# Altium PCB Grove-EMG Sensor v1.1.PcbDoc
Units mil, origin at the board's own origin, x right, y up, seen from the top; angles counter-clockwise.
Board outline 2437.42 x 1044.49 mil, 2 copper layers (Top, Bottom); 56 components, 20 nets, 216 pads, 43 vias.
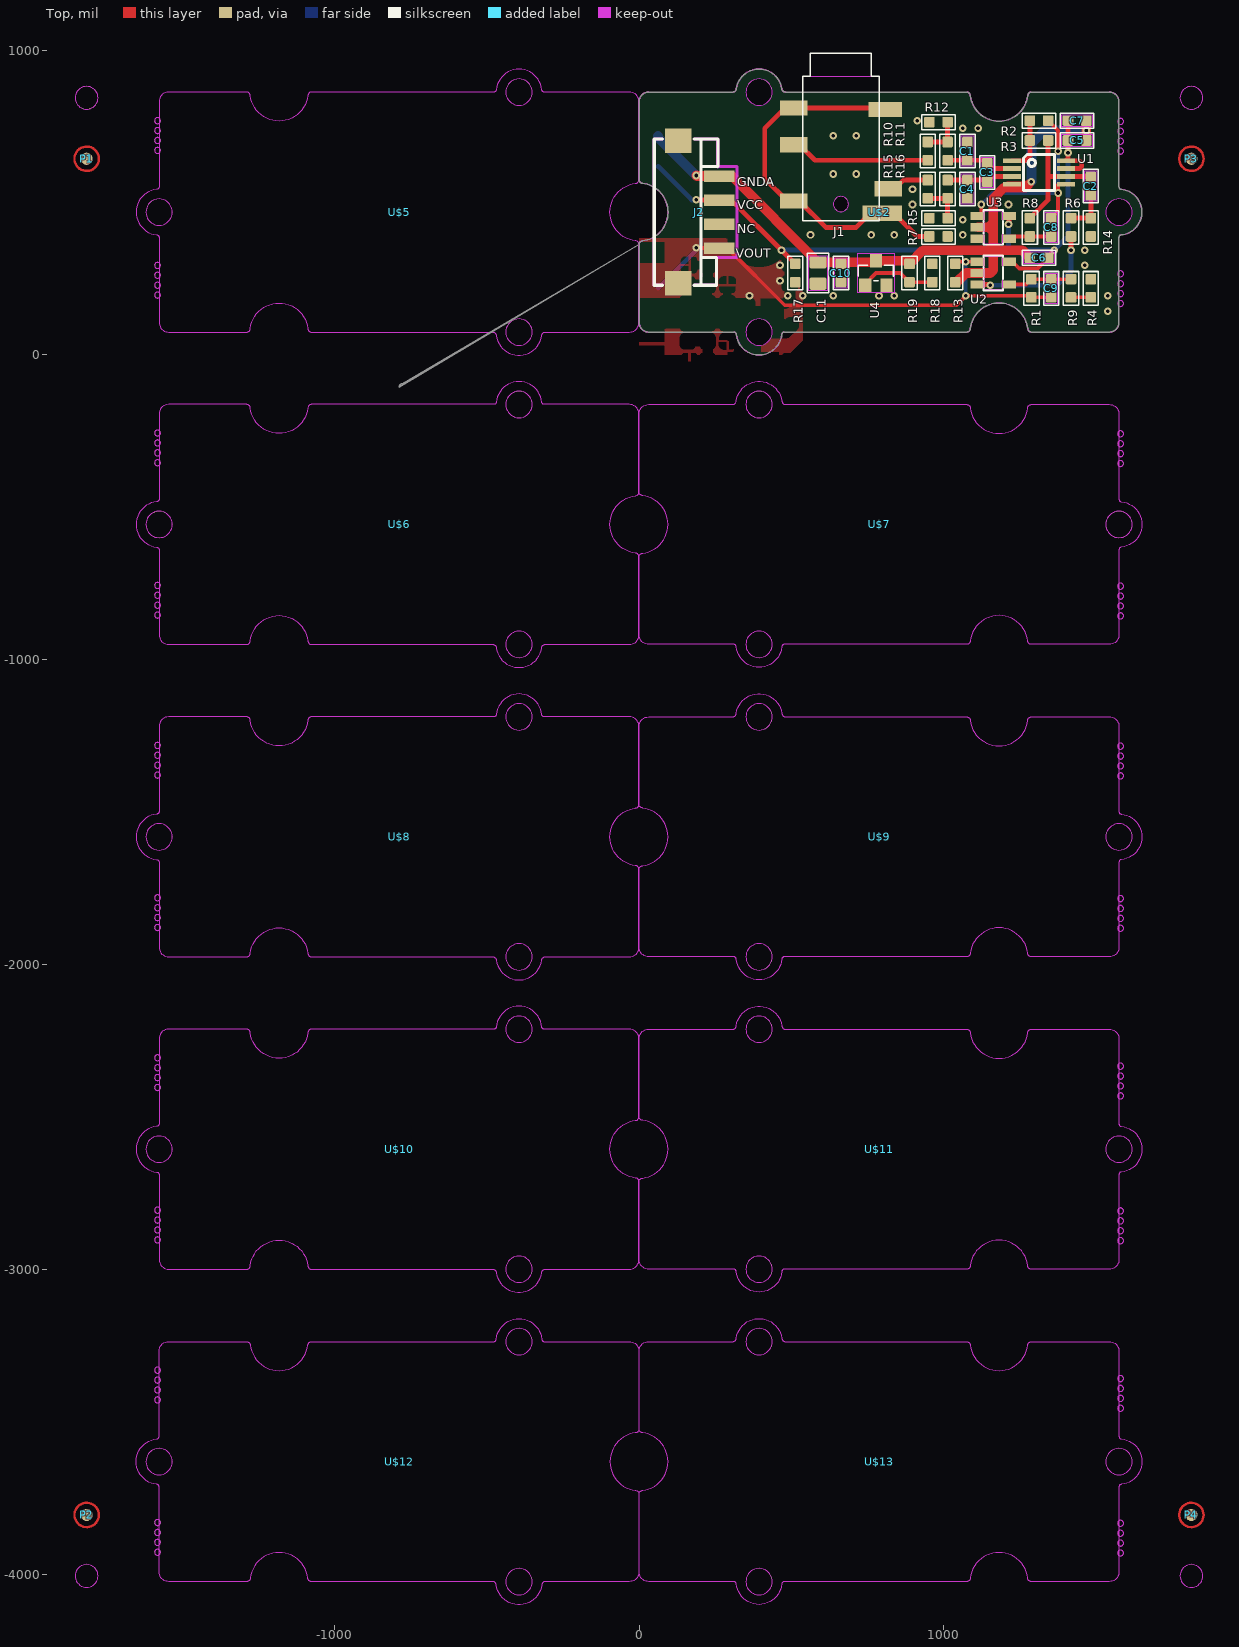
[diagram p0: Top view]
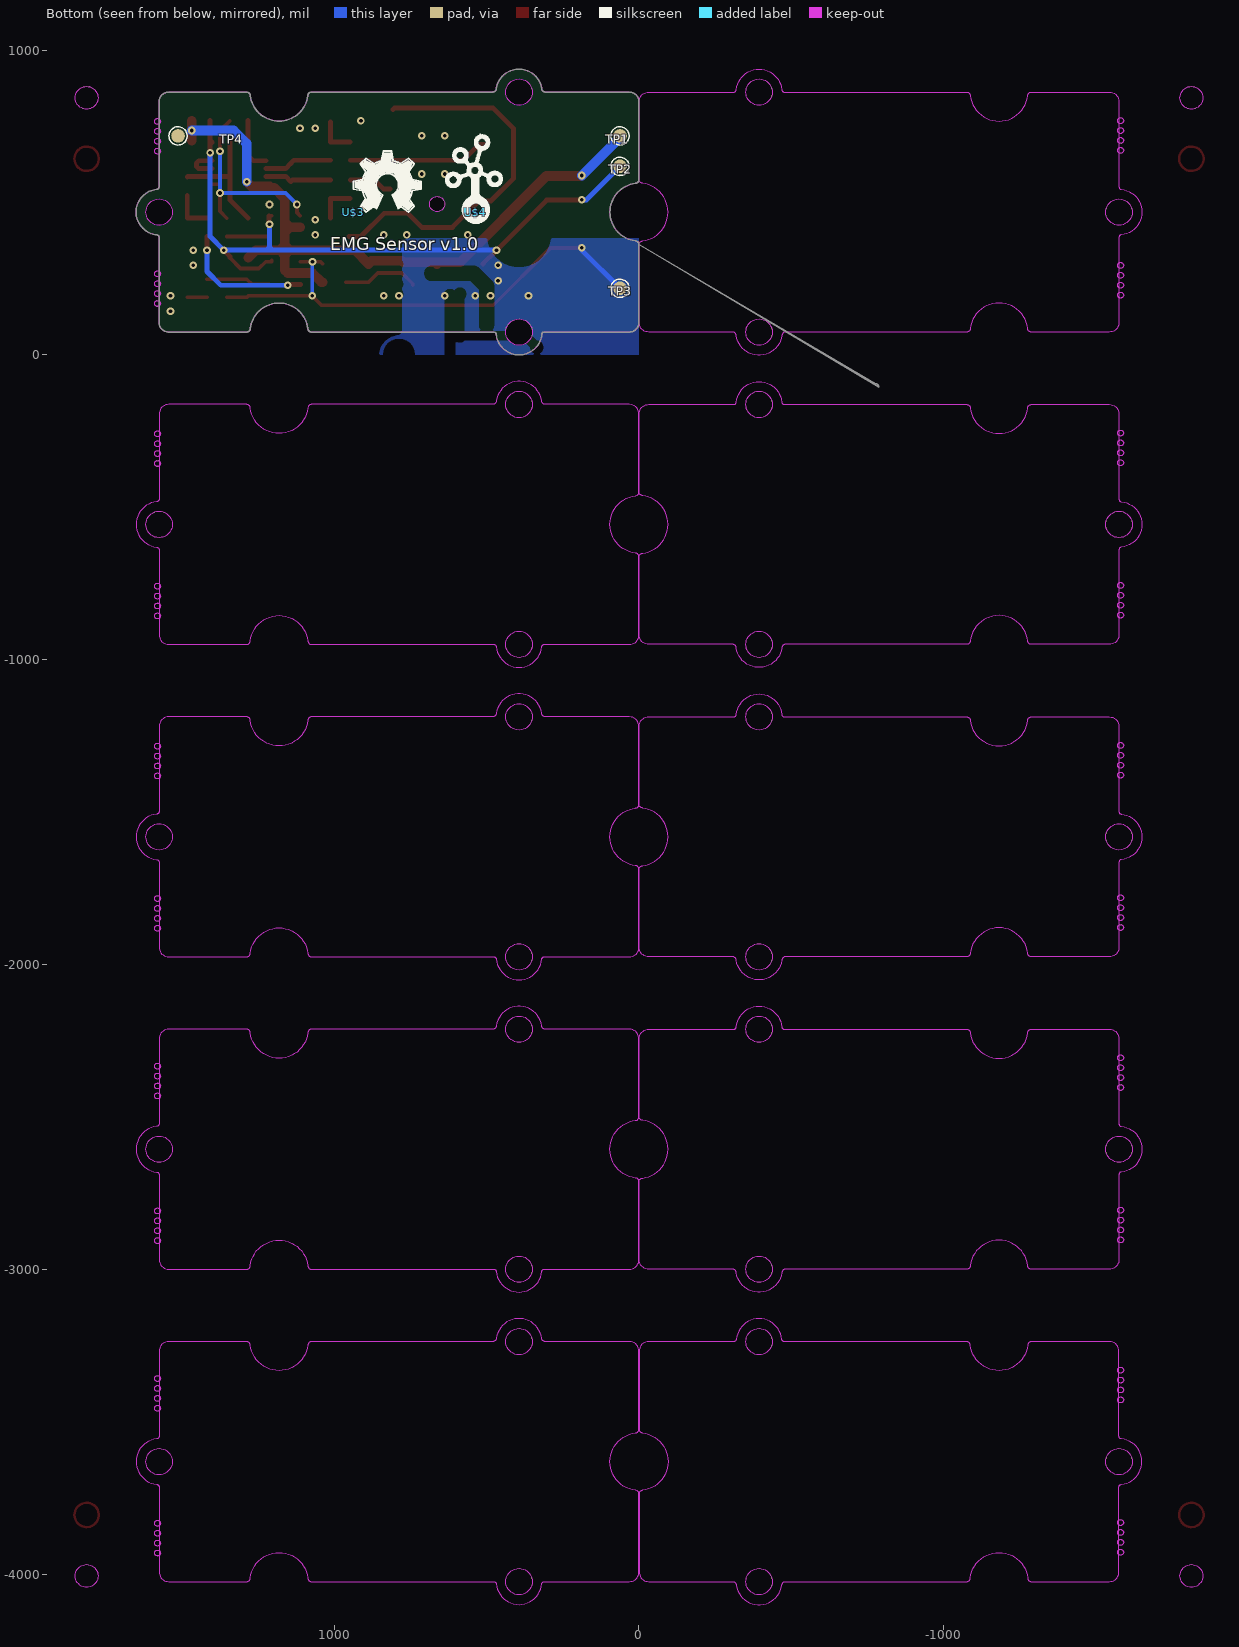
[diagram p1: Bottom view, seen from below]

## Layer stack, top to bottom
Top Solder: solder mask 0.4, Solder Resist, Dk 3.5
Top: signal copper 1.378
Dielectric 1: dielectric 12.6, FR-4, Dk 4.8
Bottom: signal copper 1.378
Bottom Solder: solder mask 0.4, Solder Resist, Dk 3.5

## Board outline
0,362.61 cw(c11.81,362.61) 11.81,374.42 ccw(c0,468.91) 11.81,563.4 cw(c11.81,575.21) 0,575.21 0,831.11 cw(c31.5,831.11) 31.49,862.61 307.08,862.61 ccw(c307.08,874.42) 318.9,874.42 cw(c393.7,862.61) 468.5,874.42 ccw(c480.31,874.42) 480.31,862.61 1074.8,862.61 cw(c1074.8,850.8) 1086.61,850.8 ccw(c1181.1,862.61) 1275.59,850.8 cw(c1287.4,850.8) 1287.4,862.61 1543.31,862.61 cw(c1543.31,831.11) 1574.8,831.11 1574.8,551.59 ccw(c1582.68,551.59) 1582.68,543.71 cw(c1574.81,468.91) 1582.68,394.11 ccw(c1582.68,386.23) 1574.8,386.23 1574.8,106.71 cw(c1543.31,106.7) 1543.31,75.21 1287.4,75.21 cw(c1287.4,87.02) 1275.59,87.02 ccw(c1181.1,75.21) 1086.61,87.02 cw(c1074.8,87.02) 1074.8,75.21 476.38,75.21 ccw(c476.38,67.33) 468.5,67.34 cw(c393.7,75.21) 318.9,67.34 ccw(c311.02,67.33) 311.02,75.21 31.49,75.21 cw(c31.5,106.7) 0,106.71 0,362.61 ccw(c-775.59,-106.3)
cut-out: -0.2,-2243.89 ccw(c-31.7,-2243.89) -31.69,-2212.39 -311.22,-2212.39 cw(c-311.23,-2204.52) -319.1,-2204.52 ccw(c-393.9,-2212.39) -468.7,-2204.52 cw(c-476.57,-2204.52) -476.58,-2212.39 -1075,-2212.39 ccw(c-1075,-2224.2) -1086.81,-2224.2 cw(c-1181.3,-2212.39) -1275.79,-2224.2 ccw(c-1287.6,-2224.2) -1287.6,-2212.39 -1543.51,-2212.39 ccw(c-1543.51,-2243.89) -1575,-2243.89 -1575,-2523.41 cw(c-1582.88,-2523.41) -1582.88,-2531.29 ccw(c-1575.01,-2606.09) -1582.88,-2680.89 cw(c-1582.88,-2688.77) -1575,-2688.77 -1575,-2968.29 ccw(c-1543.51,-2968.3) -1543.51,-2999.79 -1287.6,-2999.79 ccw(c-1287.6,-2987.98) -1275.79,-2987.98 cw(c-1181.3,-2999.79) -1086.81,-2987.98 ccw(c-1075,-2987.98) -1075,-2999.79 -480.51,-2999.79 cw(c-480.51,-3011.6) -468.7,-3011.6 ccw(c-393.9,-2999.79) -319.1,-3011.6 cw(c-307.29,-3011.61) -307.28,-2999.79 -31.69,-2999.79 ccw(c-31.7,-2968.3) -0.2,-2968.29 -0.2,-2712.39 ccw(c-12.01,-2712.39) -12.01,-2700.58 cw(c-0.2,-2606.09) -12.01,-2511.6 ccw(c-12.01,-2499.79) -0.2,-2499.79
cut-out: 0,-1687.39 cw(c11.81,-1687.39) 11.81,-1675.58 ccw(c0,-1581.09) 11.81,-1486.6 cw(c11.81,-1474.79) 0,-1474.79 0,-1218.89 cw(c31.5,-1218.89) 31.49,-1187.39 307.08,-1187.39 ccw(c307.08,-1175.58) 318.9,-1175.58 cw(c393.7,-1187.39) 468.5,-1175.58 ccw(c480.31,-1175.58) 480.31,-1187.39 1074.8,-1187.39 cw(c1074.8,-1199.2) 1086.61,-1199.2 ccw(c1181.1,-1187.39) 1275.59,-1199.2 cw(c1287.4,-1199.2) 1287.4,-1187.39 1543.31,-1187.39 cw(c1543.31,-1218.89) 1574.8,-1218.89 1574.8,-1498.41 ccw(c1582.68,-1498.41) 1582.68,-1506.29 cw(c1574.81,-1581.09) 1582.68,-1655.89 ccw(c1582.68,-1663.77) 1574.8,-1663.77 1574.8,-1943.29 cw(c1543.31,-1943.3) 1543.31,-1974.79 1287.4,-1974.79 cw(c1287.4,-1962.98) 1275.59,-1962.98 ccw(c1181.1,-1974.79) 1086.61,-1962.98 cw(c1074.8,-1962.98) 1074.8,-1974.79 476.38,-1974.79 ccw(c476.38,-1982.67) 468.5,-1982.66 cw(c393.7,-1974.79) 318.9,-1982.66 ccw(c311.02,-1982.67) 311.02,-1974.79 31.49,-1974.79 cw(c31.5,-1943.3) 0,-1943.29
cut-out: 0,-2712.39 cw(c11.81,-2712.39) 11.81,-2700.58 ccw(c0,-2606.09) 11.81,-2511.6 cw(c11.81,-2499.79) 0,-2499.79 0,-2243.89 cw(c31.5,-2243.89) 31.49,-2212.39 307.08,-2212.39 ccw(c307.08,-2200.58) 318.9,-2200.58 cw(c393.7,-2212.39) 468.5,-2200.58 ccw(c480.31,-2200.58) 480.31,-2212.39 1074.8,-2212.39 cw(c1074.8,-2224.2) 1086.61,-2224.2 ccw(c1181.1,-2212.39) 1275.59,-2224.2 cw(c1287.4,-2224.2) 1287.4,-2212.39 1543.31,-2212.39 cw(c1543.31,-2243.89) 1574.8,-2243.89 1574.8,-2523.41 ccw(c1582.68,-2523.41) 1582.68,-2531.29 cw(c1574.81,-2606.09) 1582.68,-2680.89 ccw(c1582.68,-2688.77) 1574.8,-2688.77 1574.8,-2968.29 cw(c1543.31,-2968.3) 1543.31,-2999.79 1287.4,-2999.79 cw(c1287.4,-2987.98) 1275.59,-2987.98 ccw(c1181.1,-2999.79) 1086.61,-2987.98 cw(c1074.8,-2987.98) 1074.8,-2999.79 476.38,-2999.79 ccw(c476.38,-3007.67) 468.5,-3007.66 cw(c393.7,-2999.79) 318.9,-3007.66 ccw(c311.02,-3007.67) 311.02,-2999.79 31.49,-2999.79 cw(c31.5,-2968.3) 0,-2968.29
cut-out: 0,-3737.39 cw(c11.81,-3737.39) 11.81,-3725.58 ccw(c0,-3631.09) 11.81,-3536.6 cw(c11.81,-3524.79) 0,-3524.79 0,-3268.89 cw(c31.5,-3268.89) 31.49,-3237.39 307.08,-3237.39 ccw(c307.08,-3225.58) 318.9,-3225.58 cw(c393.7,-3237.39) 468.5,-3225.58 ccw(c480.31,-3225.58) 480.31,-3237.39 1074.8,-3237.39 cw(c1074.8,-3249.2) 1086.61,-3249.2 ccw(c1181.1,-3237.39) 1275.59,-3249.2 cw(c1287.4,-3249.2) 1287.4,-3237.39 1543.31,-3237.39 cw(c1543.31,-3268.89) 1574.8,-3268.89 1574.8,-3548.41 ccw(c1582.68,-3548.41) 1582.68,-3556.29 cw(c1574.81,-3631.09) 1582.68,-3705.89 ccw(c1582.68,-3713.77) 1574.8,-3713.77 1574.8,-3993.29 cw(c1543.31,-3993.3) 1543.31,-4024.79 1287.4,-4024.79 cw(c1287.4,-4012.98) 1275.59,-4012.98 ccw(c1181.1,-4024.79) 1086.61,-4012.98 cw(c1074.8,-4012.98) 1074.8,-4024.79 476.38,-4024.79 ccw(c476.38,-4032.67) 468.5,-4032.66 cw(c393.7,-4024.79) 318.9,-4032.66 ccw(c311.02,-4032.67) 311.02,-4024.79 31.49,-4024.79 cw(c31.5,-3993.3) 0,-3993.29
cut-out: -0.2,-3524.79 cw(c-12.01,-3524.79) -12.01,-3536.6 ccw(c-0.2,-3631.09) -12.01,-3725.58 cw(c-12.01,-3737.39) -0.2,-3737.39 -0.2,-3993.29 cw(c-31.7,-3993.3) -31.69,-4024.79 -307.28,-4024.79 ccw(c-307.29,-4036.61) -319.1,-4036.6 cw(c-393.9,-4024.79) -468.7,-4036.6 ccw(c-480.51,-4036.6) -480.51,-4024.79 -1075,-4024.79 cw(c-1075,-4012.98) -1086.81,-4012.98 ccw(c-1181.3,-4024.79) -1275.79,-4012.98 cw(c-1287.6,-4012.98) -1287.6,-4024.79 -1543.51,-4024.79 cw(c-1543.51,-3993.3) -1575,-3993.29 -1575,-3713.77 ccw(c-1582.88,-3713.77) -1582.88,-3705.89 cw(c-1575.01,-3631.09) -1582.88,-3556.29 ccw(c-1582.88,-3548.41) -1575,-3548.41 -1575,-3268.89 cw(c-1543.51,-3268.89) -1543.51,-3237.39 -1287.6,-3237.39 cw(c-1287.6,-3249.2) -1275.79,-3249.2 ccw(c-1181.3,-3237.39) -1086.81,-3249.2 cw(c-1075,-3249.2) -1075,-3237.39 -476.58,-3237.39 ccw(c-476.57,-3229.52) -468.7,-3229.52 cw(c-393.9,-3237.39) -319.1,-3229.52 ccw(c-311.23,-3229.52) -311.22,-3237.39 -31.69,-3237.39 cw(c-31.7,-3268.89) -0.2,-3268.89
cut-out: -0.2,-1218.89 ccw(c-31.7,-1218.89) -31.69,-1187.39 -311.22,-1187.39 cw(c-311.23,-1179.52) -319.1,-1179.52 ccw(c-393.9,-1187.39) -468.7,-1179.52 cw(c-476.57,-1179.52) -476.58,-1187.39 -1075,-1187.39 ccw(c-1075,-1199.2) -1086.81,-1199.2 cw(c-1181.3,-1187.39) -1275.79,-1199.2 ccw(c-1287.6,-1199.2) -1287.6,-1187.39 -1543.51,-1187.39 ccw(c-1543.51,-1218.89) -1575,-1218.89 -1575,-1498.41 cw(c-1582.88,-1498.41) -1582.88,-1506.29 ccw(c-1575.01,-1581.09) -1582.88,-1655.89 cw(c-1582.88,-1663.77) -1575,-1663.77 -1575,-1943.29 ccw(c-1543.51,-1943.3) -1543.51,-1974.79 -1287.6,-1974.79 ccw(c-1287.6,-1962.98) -1275.79,-1962.98 cw(c-1181.3,-1974.79) -1086.81,-1962.98 ccw(c-1075,-1962.98) -1075,-1974.79 -480.51,-1974.79 cw(c-480.51,-1986.6) -468.7,-1986.6 ccw(c-393.9,-1974.79) -319.1,-1986.6 cw(c-307.29,-1986.61) -307.28,-1974.79 -31.69,-1974.79 ccw(c-31.7,-1943.3) -0.2,-1943.29 -0.2,-1687.39 ccw(c-12.01,-1687.39) -12.01,-1675.58 cw(c-0.2,-1581.09) -12.01,-1486.6 ccw(c-12.01,-1474.79) -0.2,-1474.79
cut-out: -0.2,831.11 ccw(c-31.7,831.11) -31.69,862.61 -311.22,862.61 cw(c-311.23,870.48) -319.1,870.48 ccw(c-393.9,862.61) -468.7,870.48 cw(c-476.57,870.48) -476.58,862.61 -1075,862.61 ccw(c-1075,850.8) -1086.81,850.8 cw(c-1181.3,862.61) -1275.79,850.8 ccw(c-1287.6,850.8) -1287.6,862.61 -1543.51,862.61 ccw(c-1543.51,831.11) -1575,831.11 -1575,551.59 cw(c-1582.88,551.59) -1582.88,543.71 ccw(c-1575.01,468.91) -1582.88,394.11 cw(c-1582.88,386.23) -1575,386.23 -1575,106.71 ccw(c-1543.51,106.7) -1543.51,75.21 -1287.6,75.21 ccw(c-1287.6,87.02) -1275.79,87.02 cw(c-1181.3,75.21) -1086.81,87.02 ccw(c-1075,87.02) -1075,75.21 -480.51,75.21 cw(c-480.51,63.4) -468.7,63.4 ccw(c-393.9,75.21) -319.1,63.4 cw(c-307.29,63.39) -307.28,75.21 -31.69,75.21 ccw(c-31.7,106.7) -0.2,106.71 -0.2,362.61 ccw(c-12.01,362.61) -12.01,374.42 cw(c-0.2,468.91) -12.01,563.4 ccw(c-12.01,575.21) -0.2,575.21
cut-out: 0,-662.39 cw(c11.81,-662.39) 11.81,-650.58 ccw(c0,-556.09) 11.81,-461.6 cw(c11.81,-449.79) 0,-449.79 0,-193.89 cw(c31.5,-193.89) 31.49,-162.39 307.08,-162.39 ccw(c307.08,-150.58) 318.9,-150.58 cw(c393.7,-162.39) 468.5,-150.58 ccw(c480.31,-150.58) 480.31,-162.39 1074.8,-162.39 cw(c1074.8,-174.2) 1086.61,-174.2 ccw(c1181.1,-162.39) 1275.59,-174.2 cw(c1287.4,-174.2) 1287.4,-162.39 1543.31,-162.39 cw(c1543.31,-193.89) 1574.8,-193.89 1574.8,-473.41 ccw(c1582.68,-473.41) 1582.68,-481.29 cw(c1574.81,-556.09) 1582.68,-630.89 ccw(c1582.68,-638.77) 1574.8,-638.77 1574.8,-918.29 cw(c1543.31,-918.3) 1543.31,-949.79 1287.4,-949.79 cw(c1287.4,-937.98) 1275.59,-937.98 ccw(c1181.1,-949.79) 1086.61,-937.98 cw(c1074.8,-937.98) 1074.8,-949.79 476.38,-949.79 ccw(c476.38,-957.67) 468.5,-957.66 cw(c393.7,-949.79) 318.9,-957.66 ccw(c311.02,-957.67) 311.02,-949.79 31.49,-949.79 cw(c31.5,-918.3) 0,-918.29
cut-out: -0.2,-193.89 ccw(c-31.7,-193.89) -31.69,-162.39 -311.22,-162.39 cw(c-311.23,-154.52) -319.1,-154.52 ccw(c-393.9,-162.39) -468.7,-154.52 cw(c-476.57,-154.52) -476.58,-162.39 -1075,-162.39 ccw(c-1075,-174.2) -1086.81,-174.2 cw(c-1181.3,-162.39) -1275.79,-174.2 ccw(c-1287.6,-174.2) -1287.6,-162.39 -1543.51,-162.39 ccw(c-1543.51,-193.89) -1575,-193.89 -1575,-473.41 cw(c-1582.88,-473.41) -1582.88,-481.29 ccw(c-1575.01,-556.09) -1582.88,-630.89 cw(c-1582.88,-638.77) -1575,-638.77 -1575,-918.29 ccw(c-1543.51,-918.3) -1543.51,-949.79 -1287.6,-949.79 ccw(c-1287.6,-937.98) -1275.79,-937.98 cw(c-1181.3,-949.79) -1086.81,-937.98 ccw(c-1075,-937.98) -1075,-949.79 -480.51,-949.79 cw(c-480.51,-961.6) -468.7,-961.6 ccw(c-393.9,-949.79) -319.1,-961.6 cw(c-307.29,-961.61) -307.28,-949.79 -31.69,-949.79 ccw(c-31.7,-918.3) -0.2,-918.29 -0.2,-662.39 ccw(c-12.01,-662.39) -12.01,-650.58 cw(c-0.2,-556.09) -12.01,-461.6 ccw(c-12.01,-449.79) -0.2,-449.79
cut-out: 393.7,-205.7 ccw(c393.7,-162.39) 437,-162.39 ccw(c393.7,-162.39) 393.7,-119.09 ccw(c393.7,-162.39) 350.39,-162.39 ccw(c393.7,-162.39)
cut-out: 393.7,-993.1 ccw(c393.7,-949.79) 437,-949.79 ccw(c393.7,-949.79) 393.7,-906.49 ccw(c393.7,-949.79) 350.39,-949.79 ccw(c393.7,-949.79)
cut-out: -1575,-599.4 ccw(c-1575,-556.09) -1531.69,-556.09 ccw(c-1575,-556.09) -1575,-512.79 ccw(c-1575,-556.09) -1618.31,-556.09 ccw(c-1575,-556.09)
cut-out: 1574.8,-599.4 ccw(c1574.8,-556.09) 1618.11,-556.09 ccw(c1574.8,-556.09) 1574.8,-512.79 ccw(c1574.8,-556.09) 1531.49,-556.09 ccw(c1574.8,-556.09)
cut-out: -1575,-1624.4 ccw(c-1575,-1581.09) -1531.69,-1581.09 ccw(c-1575,-1581.09) -1575,-1537.79 ccw(c-1575,-1581.09) -1618.31,-1581.09 ccw(c-1575,-1581.09)
cut-out: -393.9,-2018.1 ccw(c-393.9,-1974.79) -350.6,-1974.79 ccw(c-393.9,-1974.79) -393.9,-1931.49 ccw(c-393.9,-1974.79) -437.2,-1974.79 ccw(c-393.9,-1974.79)
cut-out: -393.9,-1230.7 ccw(c-393.9,-1187.39) -350.6,-1187.39 ccw(c-393.9,-1187.39) -393.9,-1144.09 ccw(c-393.9,-1187.39) -437.2,-1187.39 ccw(c-393.9,-1187.39)
cut-out: -393.9,-993.1 ccw(c-393.9,-949.79) -350.6,-949.79 ccw(c-393.9,-949.79) -393.9,-906.49 ccw(c-393.9,-949.79) -437.2,-949.79 ccw(c-393.9,-949.79)
cut-out: 1574.8,425.6 ccw(c1574.8,468.91) 1618.11,468.91 ccw(c1574.8,468.91) 1574.8,512.21 ccw(c1574.8,468.91) 1531.49,468.91 ccw(c1574.8,468.91)
cut-out: 393.7,819.3 ccw(c393.7,862.61) 437,862.61 ccw(c393.7,862.61) 393.7,905.91 ccw(c393.7,862.61) 350.39,862.61 ccw(c393.7,862.61)
cut-out: 393.7,31.9 ccw(c393.7,75.21) 437,75.21 ccw(c393.7,75.21) 393.7,118.51 ccw(c393.7,75.21) 350.39,75.21 ccw(c393.7,75.21)
cut-out: -393.9,819.3 ccw(c-393.9,862.61) -350.6,862.61 ccw(c-393.9,862.61) -393.9,905.91 ccw(c-393.9,862.61) -437.2,862.61 ccw(c-393.9,862.61)
cut-out: -393.9,-205.7 ccw(c-393.9,-162.39) -350.6,-162.39 ccw(c-393.9,-162.39) -393.9,-119.09 ccw(c-393.9,-162.39) -437.2,-162.39 ccw(c-393.9,-162.39)
cut-out: -1575,425.6 ccw(c-1575,468.91) -1531.69,468.91 ccw(c-1575,468.91) -1575,512.21 ccw(c-1575,468.91) -1618.31,468.91 ccw(c-1575,468.91)
cut-out: -393.9,31.9 ccw(c-393.9,75.21) -350.6,75.21 ccw(c-393.9,75.21) -393.9,118.51 ccw(c-393.9,75.21) -437.2,75.21 ccw(c-393.9,75.21)
cut-out: -393.9,-4068.1 ccw(c-393.9,-4024.79) -350.6,-4024.79 ccw(c-393.9,-4024.79) -393.9,-3981.49 ccw(c-393.9,-4024.79) -437.2,-4024.79 ccw(c-393.9,-4024.79)
cut-out: -393.9,-3280.7 ccw(c-393.9,-3237.39) -350.6,-3237.39 ccw(c-393.9,-3237.39) -393.9,-3194.09 ccw(c-393.9,-3237.39) -437.2,-3237.39 ccw(c-393.9,-3237.39)
cut-out: 1574.8,-2649.4 ccw(c1574.8,-2606.09) 1618.11,-2606.09 ccw(c1574.8,-2606.09) 1574.8,-2562.79 ccw(c1574.8,-2606.09) 1531.49,-2606.09 ccw(c1574.8,-2606.09)
cut-out: -1575,-3674.4 ccw(c-1575,-3631.09) -1531.69,-3631.09 ccw(c-1575,-3631.09) -1575,-3587.79 ccw(c-1575,-3631.09) -1618.31,-3631.09 ccw(c-1575,-3631.09)
cut-out: 1574.8,-3674.4 ccw(c1574.8,-3631.09) 1618.11,-3631.09 ccw(c1574.8,-3631.09) 1574.8,-3587.79 ccw(c1574.8,-3631.09) 1531.49,-3631.09 ccw(c1574.8,-3631.09)
cut-out: 393.7,-3280.7 ccw(c393.7,-3237.39) 437,-3237.39 ccw(c393.7,-3237.39) 393.7,-3194.09 ccw(c393.7,-3237.39) 350.39,-3237.39 ccw(c393.7,-3237.39)
cut-out: 393.7,-4068.1 ccw(c393.7,-4024.79) 437,-4024.79 ccw(c393.7,-4024.79) 393.7,-3981.49 ccw(c393.7,-4024.79) 350.39,-4024.79 ccw(c393.7,-4024.79)
cut-out: 393.7,-2255.7 ccw(c393.7,-2212.39) 437,-2212.39 ccw(c393.7,-2212.39) 393.7,-2169.09 ccw(c393.7,-2212.39) 350.39,-2212.39 ccw(c393.7,-2212.39)
cut-out: 1574.8,-1624.4 ccw(c1574.8,-1581.09) 1618.11,-1581.09 ccw(c1574.8,-1581.09) 1574.8,-1537.79 ccw(c1574.8,-1581.09) 1531.49,-1581.09 ccw(c1574.8,-1581.09)
cut-out: 393.7,-1230.7 ccw(c393.7,-1187.39) 437,-1187.39 ccw(c393.7,-1187.39) 393.7,-1144.09 ccw(c393.7,-1187.39) 350.39,-1187.39 ccw(c393.7,-1187.39)
cut-out: 393.7,-2018.1 ccw(c393.7,-1974.79) 437,-1974.79 ccw(c393.7,-1974.79) 393.7,-1931.49 ccw(c393.7,-1974.79) 350.39,-1974.79 ccw(c393.7,-1974.79)
cut-out: -393.9,-2255.7 ccw(c-393.9,-2212.39) -350.6,-2212.39 ccw(c-393.9,-2212.39) -393.9,-2169.09 ccw(c-393.9,-2212.39) -437.2,-2212.39 ccw(c-393.9,-2212.39)
cut-out: 393.7,-3043.1 ccw(c393.7,-2999.79) 437,-2999.79 ccw(c393.7,-2999.79) 393.7,-2956.49 ccw(c393.7,-2999.79) 350.39,-2999.79 ccw(c393.7,-2999.79)
cut-out: -1575,-2649.4 ccw(c-1575,-2606.09) -1531.69,-2606.09 ccw(c-1575,-2606.09) -1575,-2562.79 ccw(c-1575,-2606.09) -1618.31,-2606.09 ccw(c-1575,-2606.09)
cut-out: -393.9,-3043.1 ccw(c-393.9,-2999.79) -350.6,-2999.79 ccw(c-393.9,-2999.79) -393.9,-2956.49 ccw(c-393.9,-2999.79) -437.2,-2999.79 ccw(c-393.9,-2999.79)
cut-out: 1812.4,806.41 ccw(c1812.4,843.91) 1849.9,843.91 ccw(c1812.4,843.91) 1812.4,881.41 ccw(c1812.4,843.91) 1774.9,843.91 ccw(c1812.4,843.91)
cut-out: -1812.6,806.41 ccw(c-1812.6,843.91) -1775.1,843.91 ccw(c-1812.6,843.91) -1812.6,881.41 ccw(c-1812.6,843.91) -1850.1,843.91 ccw(c-1812.6,843.91)
cut-out: -1812.6,-4043.59 ccw(c-1812.6,-4006.09) -1775.1,-4006.09 ccw(c-1812.6,-4006.09) -1812.6,-3968.59 ccw(c-1812.6,-4006.09) -1850.1,-4006.09 ccw(c-1812.6,-4006.09)
cut-out: 1812.4,-4043.59 ccw(c1812.4,-4006.09) 1849.9,-4006.09 ccw(c1812.4,-4006.09) 1812.4,-3968.59 ccw(c1812.4,-4006.09) 1774.9,-4006.09 ccw(c1812.4,-4006.09)
cut-out: 662.4,470.17 ccw(c662.4,495.17) 687.4,495.17 ccw(c662.4,495.17) 662.4,520.17 ccw(c662.4,495.17) 637.4,495.17 ccw(c662.4,495.17)
cut-out: -1580.1,-3938.44 ccw(c-1580.1,-3928.59) -1570.26,-3928.59 ccw(c-1580.1,-3928.59) -1580.1,-3918.75 ccw(c-1580.1,-3928.59) -1589.94,-3928.59 ccw(c-1580.1,-3928.59)
cut-out: -1580.1,-3840.94 ccw(c-1580.1,-3831.09) -1570.26,-3831.09 ccw(c-1580.1,-3831.09) -1580.1,-3821.25 ccw(c-1580.1,-3831.09) -1589.94,-3831.09 ccw(c-1580.1,-3831.09)
cut-out: 1579.9,-2883.44 ccw(c1579.9,-2873.59) 1589.74,-2873.59 ccw(c1579.9,-2873.59) 1579.9,-2863.75 ccw(c1579.9,-2873.59) 1570.06,-2873.59 ccw(c1579.9,-2873.59)
cut-out: 1579.9,-2408.44 ccw(c1579.9,-2398.59) 1589.74,-2398.59 ccw(c1579.9,-2398.59) 1579.9,-2388.75 ccw(c1579.9,-2398.59) 1570.06,-2398.59 ccw(c1579.9,-2398.59)
cut-out: 1579.9,-2375.94 ccw(c1579.9,-2366.09) 1589.74,-2366.09 ccw(c1579.9,-2366.09) 1579.9,-2356.25 ccw(c1579.9,-2366.09) 1570.06,-2366.09 ccw(c1579.9,-2366.09)
cut-out: 1579.9,-2343.44 ccw(c1579.9,-2333.59) 1589.74,-2333.59 ccw(c1579.9,-2333.59) 1579.9,-2323.75 ccw(c1579.9,-2333.59) 1570.06,-2333.59 ccw(c1579.9,-2333.59)
cut-out: 1579.9,-2850.94 ccw(c1579.9,-2841.09) 1589.74,-2841.09 ccw(c1579.9,-2841.09) 1579.9,-2831.25 ccw(c1579.9,-2841.09) 1570.06,-2841.09 ccw(c1579.9,-2841.09)
cut-out: 1579.9,-2818.44 ccw(c1579.9,-2808.59) 1589.74,-2808.59 ccw(c1579.9,-2808.59) 1579.9,-2798.75 ccw(c1579.9,-2808.59) 1570.06,-2808.59 ccw(c1579.9,-2808.59)
cut-out: 1579.9,-2915.94 ccw(c1579.9,-2906.09) 1589.74,-2906.09 ccw(c1579.9,-2906.09) 1579.9,-2896.25 ccw(c1579.9,-2906.09) 1570.06,-2906.09 ccw(c1579.9,-2906.09)
cut-out: -1580.1,-3905.94 ccw(c-1580.1,-3896.09) -1570.26,-3896.09 ccw(c-1580.1,-3896.09) -1580.1,-3886.25 ccw(c-1580.1,-3896.09) -1589.94,-3896.09 ccw(c-1580.1,-3896.09)
cut-out: 1579.9,-3940.94 ccw(c1579.9,-3931.09) 1589.74,-3931.09 ccw(c1579.9,-3931.09) 1579.9,-3921.25 ccw(c1579.9,-3931.09) 1570.06,-3931.09 ccw(c1579.9,-3931.09)
cut-out: 1579.9,-3433.44 ccw(c1579.9,-3423.59) 1589.74,-3423.59 ccw(c1579.9,-3423.59) 1579.9,-3413.75 ccw(c1579.9,-3423.59) 1570.06,-3423.59 ccw(c1579.9,-3423.59)
cut-out: 1579.9,-3400.94 ccw(c1579.9,-3391.09) 1589.74,-3391.09 ccw(c1579.9,-3391.09) 1579.9,-3381.25 ccw(c1579.9,-3391.09) 1570.06,-3391.09 ccw(c1579.9,-3391.09)
cut-out: 1579.9,-3908.44 ccw(c1579.9,-3898.59) 1589.74,-3898.59 ccw(c1579.9,-3898.59) 1579.9,-3888.75 ccw(c1579.9,-3898.59) 1570.06,-3898.59 ccw(c1579.9,-3898.59)
cut-out: 1579.9,-3875.94 ccw(c1579.9,-3866.09) 1589.74,-3866.09 ccw(c1579.9,-3866.09) 1579.9,-3856.25 ccw(c1579.9,-3866.09) 1570.06,-3866.09 ccw(c1579.9,-3866.09)
cut-out: 1579.9,-3843.44 ccw(c1579.9,-3833.59) 1589.74,-3833.59 ccw(c1579.9,-3833.59) 1579.9,-3823.75 ccw(c1579.9,-3833.59) 1570.06,-3833.59 ccw(c1579.9,-3833.59)
cut-out: 1579.9,-3368.44 ccw(c1579.9,-3358.59) 1589.74,-3358.59 ccw(c1579.9,-3358.59) 1579.9,-3348.75 ccw(c1579.9,-3358.59) 1570.06,-3358.59 ccw(c1579.9,-3358.59)
cut-out: -1580.1,-3438.44 ccw(c-1580.1,-3428.59) -1570.26,-3428.59 ccw(c-1580.1,-3428.59) -1580.1,-3418.75 ccw(c-1580.1,-3428.59) -1589.94,-3428.59 ccw(c-1580.1,-3428.59)
cut-out: -1580.1,-3340.94 ccw(c-1580.1,-3331.09) -1570.26,-3331.09 ccw(c-1580.1,-3331.09) -1580.1,-3321.25 ccw(c-1580.1,-3331.09) -1589.94,-3331.09 ccw(c-1580.1,-3331.09)
cut-out: -1580.1,-3873.44 ccw(c-1580.1,-3863.59) -1570.26,-3863.59 ccw(c-1580.1,-3863.59) -1580.1,-3853.75 ccw(c-1580.1,-3863.59) -1589.94,-3863.59 ccw(c-1580.1,-3863.59)
cut-out: 1579.9,-3465.94 ccw(c1579.9,-3456.09) 1589.74,-3456.09 ccw(c1579.9,-3456.09) 1579.9,-3446.25 ccw(c1579.9,-3456.09) 1570.06,-3456.09 ccw(c1579.9,-3456.09)
cut-out: -1580.1,-3373.44 ccw(c-1580.1,-3363.59) -1570.26,-3363.59 ccw(c-1580.1,-3363.59) -1580.1,-3353.75 ccw(c-1580.1,-3363.59) -1589.94,-3363.59 ccw(c-1580.1,-3363.59)
cut-out: -1580.1,-3405.94 ccw(c-1580.1,-3396.09) -1570.26,-3396.09 ccw(c-1580.1,-3396.09) -1580.1,-3386.25 ccw(c-1580.1,-3396.09) -1589.94,-3396.09 ccw(c-1580.1,-3396.09)
cut-out: -1580.1,-830.94 ccw(c-1580.1,-821.09) -1570.26,-821.09 ccw(c-1580.1,-821.09) -1580.1,-811.25 ccw(c-1580.1,-821.09) -1589.94,-821.09 ccw(c-1580.1,-821.09)
cut-out: -1580.1,-798.44 ccw(c-1580.1,-788.59) -1570.26,-788.59 ccw(c-1580.1,-788.59) -1580.1,-778.75 ccw(c-1580.1,-788.59) -1589.94,-788.59 ccw(c-1580.1,-788.59)
cut-out: -1580.1,-265.94 ccw(c-1580.1,-256.09) -1570.26,-256.09 ccw(c-1580.1,-256.09) -1580.1,-246.25 ccw(c-1580.1,-256.09) -1589.94,-256.09 ccw(c-1580.1,-256.09)
cut-out: -1580.1,-863.44 ccw(c-1580.1,-853.59) -1570.26,-853.59 ccw(c-1580.1,-853.59) -1580.1,-843.75 ccw(c-1580.1,-853.59) -1589.94,-853.59 ccw(c-1580.1,-853.59)
cut-out: -1580.1,-1355.94 ccw(c-1580.1,-1346.09) -1570.26,-1346.09 ccw(c-1580.1,-1346.09) -1580.1,-1336.25 ccw(c-1580.1,-1346.09) -1589.94,-1346.09 ccw(c-1580.1,-1346.09)
cut-out: -1580.1,-1323.44 ccw(c-1580.1,-1313.59) -1570.26,-1313.59 ccw(c-1580.1,-1313.59) -1580.1,-1303.75 ccw(c-1580.1,-1313.59) -1589.94,-1313.59 ccw(c-1580.1,-1313.59)
cut-out: -1580.1,-765.94 ccw(c-1580.1,-756.09) -1570.26,-756.09 ccw(c-1580.1,-756.09) -1580.1,-746.25 ccw(c-1580.1,-756.09) -1589.94,-756.09 ccw(c-1580.1,-756.09)
cut-out: -1580.1,186.56 ccw(c-1580.1,196.41) -1570.26,196.41 ccw(c-1580.1,196.41) -1580.1,206.25 ccw(c-1580.1,196.41) -1589.94,196.41 ccw(c-1580.1,196.41)
cut-out: -1580.1,219.06 ccw(c-1580.1,228.91) -1570.26,228.91 ccw(c-1580.1,228.91) -1580.1,238.75 ccw(c-1580.1,228.91) -1589.94,228.91 ccw(c-1580.1,228.91)
cut-out: -1580.1,251.56 ccw(c-1580.1,261.41) -1570.26,261.41 ccw(c-1580.1,261.41) -1580.1,271.25 ccw(c-1580.1,261.41) -1589.94,261.41 ccw(c-1580.1,261.41)
cut-out: -1580.1,284.06 ccw(c-1580.1,293.91) -1570.26,293.91 ccw(c-1580.1,293.91) -1580.1,303.75 ccw(c-1580.1,293.91) -1589.94,293.91 ccw(c-1580.1,293.91)
cut-out: -1580.1,-363.44 ccw(c-1580.1,-353.59) -1570.26,-353.59 ccw(c-1580.1,-353.59) -1580.1,-343.75 ccw(c-1580.1,-353.59) -1589.94,-353.59 ccw(c-1580.1,-353.59)
cut-out: -1580.1,-330.94 ccw(c-1580.1,-321.09) -1570.26,-321.09 ccw(c-1580.1,-321.09) -1580.1,-311.25 ccw(c-1580.1,-321.09) -1589.94,-321.09 ccw(c-1580.1,-321.09)
cut-out: -1580.1,-298.44 ccw(c-1580.1,-288.59) -1570.26,-288.59 ccw(c-1580.1,-288.59) -1580.1,-278.75 ccw(c-1580.1,-288.59) -1589.94,-288.59 ccw(c-1580.1,-288.59)
cut-out: -1580.1,-2315.94 ccw(c-1580.1,-2306.09) -1570.26,-2306.09 ccw(c-1580.1,-2306.09) -1580.1,-2296.25 ccw(c-1580.1,-2306.09) -1589.94,-2306.09 ccw(c-1580.1,-2306.09)
cut-out: -1580.1,-2413.44 ccw(c-1580.1,-2403.59) -1570.26,-2403.59 ccw(c-1580.1,-2403.59) -1580.1,-2393.75 ccw(c-1580.1,-2403.59) -1589.94,-2403.59 ccw(c-1580.1,-2403.59)
cut-out: -1580.1,-2380.94 ccw(c-1580.1,-2371.09) -1570.26,-2371.09 ccw(c-1580.1,-2371.09) -1580.1,-2361.25 ccw(c-1580.1,-2371.09) -1589.94,-2371.09 ccw(c-1580.1,-2371.09)
cut-out: -1580.1,-2848.44 ccw(c-1580.1,-2838.59) -1570.26,-2838.59 ccw(c-1580.1,-2838.59) -1580.1,-2828.75 ccw(c-1580.1,-2838.59) -1589.94,-2838.59 ccw(c-1580.1,-2838.59)
cut-out: -1580.1,-2815.94 ccw(c-1580.1,-2806.09) -1570.26,-2806.09 ccw(c-1580.1,-2806.09) -1580.1,-2796.25 ccw(c-1580.1,-2806.09) -1589.94,-2806.09 ccw(c-1580.1,-2806.09)
cut-out: -1580.1,-2913.44 ccw(c-1580.1,-2903.59) -1570.26,-2903.59 ccw(c-1580.1,-2903.59) -1580.1,-2893.75 ccw(c-1580.1,-2903.59) -1589.94,-2903.59 ccw(c-1580.1,-2903.59)
cut-out: -1580.1,-2880.94 ccw(c-1580.1,-2871.09) -1570.26,-2871.09 ccw(c-1580.1,-2871.09) -1580.1,-2861.25 ccw(c-1580.1,-2871.09) -1589.94,-2871.09 ccw(c-1580.1,-2871.09)
cut-out: -1580.1,-1823.44 ccw(c-1580.1,-1813.59) -1570.26,-1813.59 ccw(c-1580.1,-1813.59) -1580.1,-1803.75 ccw(c-1580.1,-1813.59) -1589.94,-1813.59 ccw(c-1580.1,-1813.59)
cut-out: -1580.1,-1290.94 ccw(c-1580.1,-1281.09) -1570.26,-1281.09 ccw(c-1580.1,-1281.09) -1580.1,-1271.25 ccw(c-1580.1,-1281.09) -1589.94,-1281.09 ccw(c-1580.1,-1281.09)
cut-out: -1580.1,-1388.44 ccw(c-1580.1,-1378.59) -1570.26,-1378.59 ccw(c-1580.1,-1378.59) -1580.1,-1368.75 ccw(c-1580.1,-1378.59) -1589.94,-1378.59 ccw(c-1580.1,-1378.59)
cut-out: -1580.1,-1855.94 ccw(c-1580.1,-1846.09) -1570.26,-1846.09 ccw(c-1580.1,-1846.09) -1580.1,-1836.25 ccw(c-1580.1,-1846.09) -1589.94,-1846.09 ccw(c-1580.1,-1846.09)
cut-out: -1580.1,-2348.44 ccw(c-1580.1,-2338.59) -1570.26,-2338.59 ccw(c-1580.1,-2338.59) -1580.1,-2328.75 ccw(c-1580.1,-2338.59) -1589.94,-2338.59 ccw(c-1580.1,-2338.59)
cut-out: -1580.1,-1790.94 ccw(c-1580.1,-1781.09) -1570.26,-1781.09 ccw(c-1580.1,-1781.09) -1580.1,-1771.25 ccw(c-1580.1,-1781.09) -1589.94,-1781.09 ccw(c-1580.1,-1781.09)
cut-out: -1580.1,-1888.44 ccw(c-1580.1,-1878.59) -1570.26,-1878.59 ccw(c-1580.1,-1878.59) -1580.1,-1868.75 ccw(c-1580.1,-1878.59) -1589.94,-1878.59 ccw(c-1580.1,-1878.59)
cut-out: -1580.1,759.06 ccw(c-1580.1,768.91) -1570.26,768.91 ccw(c-1580.1,768.91) -1580.1,778.75 ccw(c-1580.1,768.91) -1589.94,768.91 ccw(c-1580.1,768.91)
cut-out: 1579.9,-833.44 ccw(c1579.9,-823.59) 1589.74,-823.59 ccw(c1579.9,-823.59) 1579.9,-813.75 ccw(c1579.9,-823.59) 1570.06,-823.59 ccw(c1579.9,-823.59)
cut-out: 1579.9,-1390.94 ccw(c1579.9,-1381.09) 1589.74,-1381.09 ccw(c1579.9,-1381.09) 1579.9,-1371.25 ccw(c1579.9,-1381.09) 1570.06,-1381.09 ccw(c1579.9,-1381.09)
cut-out: 1579.9,-1293.44 ccw(c1579.9,-1283.59) 1589.74,-1283.59 ccw(c1579.9,-1283.59) 1579.9,-1273.75 ccw(c1579.9,-1283.59) 1570.06,-1283.59 ccw(c1579.9,-1283.59)
cut-out: 1579.9,-800.94 ccw(c1579.9,-791.09) 1589.74,-791.09 ccw(c1579.9,-791.09) 1579.9,-781.25 ccw(c1579.9,-791.09) 1570.06,-791.09 ccw(c1579.9,-791.09)
cut-out: 1579.9,-333.44 ccw(c1579.9,-323.59) 1589.74,-323.59 ccw(c1579.9,-323.59) 1579.9,-313.75 ccw(c1579.9,-323.59) 1570.06,-323.59 ccw(c1579.9,-323.59)
cut-out: 1579.9,-865.94 ccw(c1579.9,-856.09) 1589.74,-856.09 ccw(c1579.9,-856.09) 1579.9,-846.25 ccw(c1579.9,-856.09) 1570.06,-856.09 ccw(c1579.9,-856.09)
cut-out: 1579.9,-768.44 ccw(c1579.9,-758.59) 1589.74,-758.59 ccw(c1579.9,-758.59) 1579.9,-748.75 ccw(c1579.9,-758.59) 1570.06,-758.59 ccw(c1579.9,-758.59)
cut-out: 1579.9,-1825.94 ccw(c1579.9,-1816.09) 1589.74,-1816.09 ccw(c1579.9,-1816.09) 1579.9,-1806.25 ccw(c1579.9,-1816.09) 1570.06,-1816.09 ccw(c1579.9,-1816.09)
cut-out: 1579.9,-1858.44 ccw(c1579.9,-1848.59) 1589.74,-1848.59 ccw(c1579.9,-1848.59) 1579.9,-1838.75 ccw(c1579.9,-1848.59) 1570.06,-1848.59 ccw(c1579.9,-1848.59)
cut-out: 1579.9,-2440.94 ccw(c1579.9,-2431.09) 1589.74,-2431.09 ccw(c1579.9,-2431.09) 1579.9,-2421.25 ccw(c1579.9,-2431.09) 1570.06,-2431.09 ccw(c1579.9,-2431.09)
cut-out: 1579.9,-1793.44 ccw(c1579.9,-1783.59) 1589.74,-1783.59 ccw(c1579.9,-1783.59) 1579.9,-1773.75 ccw(c1579.9,-1783.59) 1570.06,-1783.59 ccw(c1579.9,-1783.59)
cut-out: 1579.9,-1325.94 ccw(c1579.9,-1316.09) 1589.74,-1316.09 ccw(c1579.9,-1316.09) 1579.9,-1306.25 ccw(c1579.9,-1316.09) 1570.06,-1316.09 ccw(c1579.9,-1316.09)
cut-out: 1579.9,-1358.44 ccw(c1579.9,-1348.59) 1589.74,-1348.59 ccw(c1579.9,-1348.59) 1579.9,-1338.75 ccw(c1579.9,-1348.59) 1570.06,-1348.59 ccw(c1579.9,-1348.59)
cut-out: 1579.9,-1890.94 ccw(c1579.9,-1881.09) 1589.74,-1881.09 ccw(c1579.9,-1881.09) 1579.9,-1871.25 ccw(c1579.9,-1881.09) 1570.06,-1881.09 ccw(c1579.9,-1881.09)
cut-out: 1579.9,756.56 ccw(c1579.9,766.41) 1589.74,766.41 ccw(c1579.9,766.41) 1579.9,776.25 ccw(c1579.9,766.41) 1570.06,766.41 ccw(c1579.9,766.41)
cut-out: 1579.9,724.06 ccw(c1579.9,733.91) 1589.74,733.91 ccw(c1579.9,733.91) 1579.9,743.75 ccw(c1579.9,733.91) 1570.06,733.91 ccw(c1579.9,733.91)
cut-out: 1579.9,691.56 ccw(c1579.9,701.41) 1589.74,701.41 ccw(c1579.9,701.41) 1579.9,711.25 ccw(c1579.9,701.41) 1570.06,701.41 ccw(c1579.9,701.41)
cut-out: 1579.9,659.06 ccw(c1579.9,668.91) 1589.74,668.91 ccw(c1579.9,668.91) 1579.9,678.75 ccw(c1579.9,668.91) 1570.06,668.91 ccw(c1579.9,668.91)
cut-out: -1580.1,661.56 ccw(c-1580.1,671.41) -1570.26,671.41 ccw(c-1580.1,671.41) -1580.1,681.25 ccw(c-1580.1,671.41) -1589.94,671.41 ccw(c-1580.1,671.41)
cut-out: -1580.1,694.06 ccw(c-1580.1,703.91) -1570.26,703.91 ccw(c-1580.1,703.91) -1580.1,713.75 ccw(c-1580.1,703.91) -1589.94,703.91 ccw(c-1580.1,703.91)
cut-out: -1580.1,726.56 ccw(c-1580.1,736.41) -1570.26,736.41 ccw(c-1580.1,736.41) -1580.1,746.25 ccw(c-1580.1,736.41) -1589.94,736.41 ccw(c-1580.1,736.41)
cut-out: 1579.9,-365.94 ccw(c1579.9,-356.09) 1589.74,-356.09 ccw(c1579.9,-356.09) 1579.9,-346.25 ccw(c1579.9,-356.09) 1570.06,-356.09 ccw(c1579.9,-356.09)
cut-out: 1579.9,-268.44 ccw(c1579.9,-258.59) 1589.74,-258.59 ccw(c1579.9,-258.59) 1579.9,-248.75 ccw(c1579.9,-258.59) 1570.06,-258.59 ccw(c1579.9,-258.59)
cut-out: 1579.9,-300.94 ccw(c1579.9,-291.09) 1589.74,-291.09 ccw(c1579.9,-291.09) 1579.9,-281.25 ccw(c1579.9,-291.09) 1570.06,-291.09 ccw(c1579.9,-291.09)
cut-out: 1579.9,191.56 ccw(c1579.9,201.41) 1589.74,201.41 ccw(c1579.9,201.41) 1579.9,211.25 ccw(c1579.9,201.41) 1570.06,201.41 ccw(c1579.9,201.41)
cut-out: 1579.9,159.06 ccw(c1579.9,168.91) 1589.74,168.91 ccw(c1579.9,168.91) 1579.9,178.75 ccw(c1579.9,168.91) 1570.06,168.91 ccw(c1579.9,168.91)
cut-out: 1579.9,256.56 ccw(c1579.9,266.41) 1589.74,266.41 ccw(c1579.9,266.41) 1579.9,276.25 ccw(c1579.9,266.41) 1570.06,266.41 ccw(c1579.9,266.41)
cut-out: 1579.9,224.06 ccw(c1579.9,233.91) 1589.74,233.91 ccw(c1579.9,233.91) 1579.9,243.75 ccw(c1579.9,233.91) 1570.06,233.91 ccw(c1579.9,233.91)
cut-out: 480.69,862.99 480.85,862.61 480.69,862.23 480.31,862.07 479.93,862.23 479.77,862.61 479.93,862.99 480.31,863.15

## Design rules (kind name [scope] priority, off if disabled: settings)
BoardOutlineClearance mdCopperDimension [All] p1: gap=10 ignorepadtopadclearanceinfootprint=FALSE except(0: Arc-SplitContinuation Track-SplitContinuation SMDPad-SplitContinuation THPad-SplitContinuation Via-SplitContinuation Fill-SplitContinuation Poly-SplitContinuation Region-SplitContinuation Text-SplitContinuation)
Clearance Clearance_for_PolygonClass_Isolate_10 [InPolygonClass('Isolate_10') vs IsArc Or IsTrack Or IsPad Or IsVia Or IsFill Or IsRegion Or IsText] p1: gap=10 ignorepadtopadclearanceinfootprint=FALSE
Clearance "Clearance (Same Net)" [All] p2: gap=6 ignorepadtopadclearanceinfootprint=FALSE
Clearance Clearance_for_NetClass_pwr [InNetClass('pwr') vs InNetClass('pwr')] p3: gap=6 ignorepadtopadclearanceinfootprint=FALSE
Clearance [All] p4: gap=6 ignorepadtopadclearanceinfootprint=FALSE
HoleSize HoleSize_For_NetClass_pwr [InNetClass('pwr')] p1: absolutevalues=TRUE maxlimit=12 minlimit=12 maxpercent=80.000 minpercent=20.000
HoleSize [All] p2: absolutevalues=TRUE maxlimit=100000 minlimit=12 maxpercent=80.000 minpercent=20.000
HoleToHoleClearance mdDrill [All] p1: gap=10 allowstackedmicrovias=TRUE
MinimumSolderMaskSliver [All] p1 off: minsoldermaskwidth=10
PasteMaskExpansion Expansion_SMDPaste_OFF [InPadClass('SMDPaste_OFF')] p1: expansion=0
PasteMaskExpansion mlMinCreamFrame [All] p2: expansion=0
PolygonConnect PolygonConnect_For_PolygonThermal_ON_Width80000_Gap100000 [InPolygonClass('PolygonThermal_ON_Width80000_Gap100000') vs Not IsVia] p1: connectstyle=Relief reliefconductorwidth=8 reliefentries=4 polygonreliefangle="90 Angle" airgapwidth=10
PolygonConnect ThermalVias [IsVia] p2: connectstyle=Direct reliefconductorwidth=10 reliefentries=4 polygonreliefangle="90 Angle" airgapwidth=10
PolygonConnect [All] p3: connectstyle=Relief reliefconductorwidth=10 reliefentries=4 polygonreliefangle="90 Angle" airgapwidth=10
RoutingVias [All] p1: holewidth=12 width=24 viastyle="Through Hole" minholewidth=12 minwidth=24 maxholewidth=100 maxwidth=100
SolderMaskExpansion Expansion_SMDSolder_OFF [InPadClass('SMDSolder_OFF')] p1: expansion=0
SolderMaskExpansion mlMinStopFrame [All] p2: expansion=2
Width Width_For_NetClass_pwr [InNetClass('pwr')] p1: maxlimit=10 minlimit=6 preferedwidth=6
Width [All] p2: maxlimit=10000 minlimit=6 preferedwidth=6
26 further rules are at their usual default settings.

## Classes and differential pairs
polygon class PolygonThermal_ON_Width80000_Gap100000: Polygon_1_Net_V_REF Polygon_2_Net_V_REF
polygon class Isolate_10: Polygon_1_Net_V_REF Polygon_2_Net_V_REF
pad class SMDSolder_OFF: P1-P$1 P2-P$1 P3-P$1 P4-P$1
pad class SMDPaste_OFF: P1-P$1 P2-P$1 P3-P$1 P4-P$1 TP1-T TP2-T TP3-T TP4-T
net class pwr: GNDA

## Components (designator, comment, footprint, x,y, rotation, side; value= is the part's Value field where it differs from the comment)
C1 "100pF/COG/5%" C0603 1077.4,668.91 r270 top
C2 "1uF/X5R/10%" C0603 1482.4,553.91 r270 top
C3 "10nF/X7R/10%" C0603 1142.4,598.91 r90 top
C4 "100pF/COG/5%" C0603 1077.4,543.91 r270 top
C5 "100nF/X7R/10%" C0603 1437.4,703.91 r0 top
C6 "100nF/X7R/10%" C0603 1312.4,318.91 r0 top
C7 "1uF/X5R/10%" C0603 1437.4,768.91 r0 top
C8 "1uF/X5R/10%" C0603 1352.4,418.91 r90 top
C9 "1uF/X7R/10%" C0603 1352.4,218.91 r270 top
C10 "100nF/X7R/10%" C0603 662.4,268.91 r90 top
C11 "10uF/X7R" C0805 587.4,268.91 r270 top
J1 "J1" 6P-SMD-3.5-NEW 662.4,990.17 r90 top
J2 "Grove con" 4P-SMD-2.0 262.4,468.91 r90 top
P1 "" ROUND-MARK-1.0 -1812.6,643.91 r0 top
P2 "" ROUND-MARK-1.0 -1812.6,-3806.09 r0 top
P3 "" ROUND-MARK-1.0 1812.4,643.91 r0 top
P4 "" ROUND-MARK-1.0 1812.4,-3806.09 r0 top
R1 "100k/1%" R0603 1287.4,218.91 r270 top
R2 "10k/1%" R0603 1312.4,768.91 r0 top
R3 "10k/1%" R0603 1312.4,703.91 r180 top
R4 "0" R0603 1482.4,218.91 r90 top
R5 "NA(3.3M)" R0603 982.4,448.91 r0 top
R6 "0" R0603 1417.4,418.91 r90 top
R7 "0" R0603 982.4,388.91 r0 top
R8 "100k/1%" R0603 1282.4,418.91 r90 top
R9 "1k/1%" R0603 1417.4,218.91 r270 top
R10 "2k/1%" R0603 947.4,668.91 r90 top
R11 "2k/1%" R0603 1012.4,668.91 r90 top
R12 "NA(3.3M)" R0603 982.4,763.91 r0 top
R13 "10K/1%" R0603 1037.4,268.91 r270 top
R14 "1M/1%" R0603 1482.4,418.91 r270 top
R15 "2k/1%" R0603 947.4,543.91 r270 top
R16 "2k/1%" R0603 1012.4,543.91 r270 top
R17 "330R" R0603 512.4,268.91 r90 top
R18 "2k/1%" R0603 962.4,268.91 r90 top
R19 "10k/1%" R0603 887.4,268.91 r270 top
TP1 "" TP_4545 62.4,718.91 r180 bottom
TP2 "" TP_4545 62.4,618.91 r180 bottom
TP3 "" TP_4545 62.4,218.91 r180 bottom
TP4 "" TP_4545 1512.4,718.91 r180 bottom
U1 "INA331IDGKT" MSOP-8 1312.4,598.91 r270 top
U2 "OPA333DBV" SOT23-5 1162.4,268.91 r270 top
U3 "OPA333DBV" SOT23-5 1162.4,418.91 r270 top
U4 "CJ432" SOT23 777.4,268.91 r0 top
U$2 "" GROVE-TEST-PLATFORM 787.4,468.91 r0 top
U$3 "" OSHW_FILLX200_NOTEXT 937.4,468.91 r180 bottom
U$4 "" TWIGLOGO 537.4,468.91 r180 bottom
U$5 "" GROVE-TEST-PLATFORM -787.6,468.91 r180 top
U$6 "" GROVE-TEST-PLATFORM -787.6,-556.09 r180 top
U$7 "" GROVE-TEST-PLATFORM 787.4,-556.09 r0 top
U$8 "" GROVE-TEST-PLATFORM -787.6,-1581.09 r180 top
U$9 "" GROVE-TEST-PLATFORM 787.4,-1581.09 r0 top
U$10 "" GROVE-TEST-PLATFORM -787.6,-2606.09 r180 top
U$11 "" GROVE-TEST-PLATFORM 787.4,-2606.09 r0 top
U$12 "" GROVE-TEST-PLATFORM -787.6,-3631.09 r180 top
U$13 "" GROVE-TEST-PLATFORM 787.4,-3631.09 r0 top

## Footprints (in the part's own frame and the unit in brackets; to place one, negate y for a bottom-side part, rotate by r counter-clockwise, add the part's x,y. Pads: shape width x height; smd on the part's side, far side on the other; paste and mask are expansions set on the pad)
4P-SMD-2.0 [mil] "4P-SMD-2.0"
  rect 38x100 smd: 1(-118.11,0) 2(-39.37,0) 3(39.37,0) 4(118.11,0)
  rect 80x86 smd: SS1(-234.09,133.86) SS2(234.09,133.86)
  Top keep-out lines w10: -240.16,185.04 -240.16,212.6 240.16,212.6 240.16,185.04 ; -240.16,82.68 -240.16,7.87 ; 240.16,82.68 240.16,3.94 ; -238.31,8.11 -148.62,8.11 ; -149.61,7.87 -149.61,-59.06 149.61,-59.06 149.61,3.94 ; 148.62,4.17 238.31,4.17
  silkscreen extent -240,4 240,213
6P-SMD-3.5-NEW [mil] "6P-SMD-3.5-NEW"
  rect 50x90 smd: COM1(-180,155) L(-445,-155) R(-300,155) RS(-485,155)
  rect 50x110 smd: COM2(-185,-145)
  rect 50x130 smd: LS(-525,-135)
  Top keep-out region: -550,-125 -550,125 -75,125 -75,-125
  silkscreen extent -550,-125 0,125
C0603 [mil] "C0603"
  rrect25% 35x35 smd: 1(-30,0) 2(30,0)
  Top keep-out region: -50,-20 -50,20 50,20 50,-20
  silkscreen extent -55,-25 55,25
C0805 [mil] "C0805"
  rrect25% 40x55 smd: 1(-35,0) 2(35,0)
  Top keep-out region: -57.5,-30 -57.5,30 57.5,30 57.5,-30
  silkscreen extent -65,-35 65,35
GROVE-TEST-PLATFORM [mil] "GROVE-TEST-PLATFORM"
MSOP-8 [mil] "MSOP-8"
  rect 15.75x59.06 smd: 1(-38.39,-88.58) 2(-12.8,-88.58) 3(12.8,-88.58) 4(38.39,-88.58) 5(38.39,88.58) 6(12.8,88.58) 7(-12.8,88.58) 8(-38.39,88.58)
  silkscreen extent -59,-51 59,51
OSHW_FILLX200_NOTEXT [mil] "OSHW_FILLX200_NOTEXT"
  silkscreen extent 0,0 223,200
R0603 [mil] "R0603"
  rrect25% 35x35 smd: 1(-30,0) 2(30,0)
  silkscreen extent -55,-25 55,25
ROUND-MARK-1.0 [mil] "ROUND-MARK-1.0"
  rrect100% 40x40 smd paste-20 mask-20: P$1(0,0)
  Top circle w8: c0,0 r40
SOT23 [mil] "SOT23"
  rect 40x45 smd: 1(-35,-40) 2(35,-40) 3(0,40)
  Top keep-out region: -60,-65 -60,65 60,65 60,-65
  silkscreen extent -58,-25 58,25
SOT23-5 [mil] "SOT23-5"
  rect 27.17x47.24 smd: 1(-37.4,-51.19) 2(0,-51.19) 3(37.4,-51.19) 4(37.4,51.19) 5(-37.4,51.19)
  Top keep-out region: -55,-30 -55,30 55,30 55,-30
  silkscreen extent -57,-32 57,32
TP_4545 [mil] "TP_4545"
  rrect100% 45x45 smd paste-22.5: T(0,0)
  silkscreen extent -30,-30 30,30
TWIGLOGO [mil] "TWIGLOGO"
  silkscreen extent -98,-38 91,257

## Part data
C1 C2 C3 C4 C5 C6 C7 C8 C9 C10: library part C0603, PackageName=C0603, OriginalSource=Eagle
C11: library part C0805, PackageName=C0805, OriginalSource=Eagle
J1: library part 6P-SMD-3.5-NEW, PackageName=6P-SMD-3.5-NEW, OriginalSource=Eagle
J2: library part 4P-SMD-2.0, PackageName=4P-SMD-2.0, OriginalSource=Eagle
P1 P2 P3 P4: library part ROUND-MARK-1.0, PackageName=ROUND-MARK-1.0, OriginalSource=Eagle
R1 R2 R3 R4 R5 R6 R7 R8 R9 R10 R11 R12 R13 R14 R15 R16 R17 R18 R19: library part R0603, PackageName=R0603, OriginalSource=Eagle
TP1 TP2 TP3 TP4: library part TP_4545, PackageName=TP_4545, OriginalSource=Eagle
U1: library part MSOP-8, PackageName=MSOP-8, OriginalSource=Eagle
U2 U3: library part SOT23-5, PackageName=SOT23-5, OriginalSource=Eagle
U4: library part SOT23, PackageName=SOT23, OriginalSource=Eagle
U$2 U$5 U$6 U$7 U$8 U$9 U$10 U$11 U$12 U$13: library part GROVE-TEST-PLATFORM, PackageName=GROVE-TEST-PLATFORM, OriginalSource=Eagle
U$3: library part OSHW_FILLX200_NOTEXT, PackageName=OSHW_FILLX200_NOTEXT, OriginalSource=Eagle
U$4: library part TWIGLOGO, PackageName=TWIGLOGO, OriginalSource=Eagle

## Free pads (board coordinates)
  round 19.69 hole 19.69 unplated: MH1(-1580.1,-2806.09) MH2(-1580.1,-2903.59) MH3(-1580.1,-2871.09) MH4(-1580.1,-2838.59) MH5(-1580.1,-2306.09) MH6(-1580.1,-2403.59) MH7(-1580.1,-2371.09) MH8(-1580.1,-2338.59) MH9(-1580.1,-1781.09) MH10(-1580.1,-1878.59) MH11(-1580.1,-1846.09) MH12(-1580.1,-1813.59) MH13(-1580.1,-1281.09) MH14(-1580.1,-1378.59) MH15(-1580.1,-1346.09) MH16(-1580.1,-1313.59) MH17(-1580.1,-756.09) MH18(-1580.1,-853.59) MH19(-1580.1,-821.09) MH20(-1580.1,-788.59) MH21(-1580.1,-256.09) MH22(-1580.1,-353.59) MH23(-1580.1,-321.09) MH24(-1580.1,-288.59) MH25(-1580.1,293.91) MH26(-1580.1,196.41) MH27(-1580.1,228.91) MH28(-1580.1,261.41) MH29(-1580.1,768.91) MH30(-1580.1,671.41) MH31(-1580.1,703.91) MH32(-1580.1,736.41) MH33(1579.9,668.91) MH34(1579.9,766.41) MH35(1579.9,733.91) MH36(1579.9,701.41) MH37(1579.9,168.91) MH38(1579.9,266.41) MH39(1579.9,233.91) MH40(1579.9,201.41) MH41(1579.9,-356.09) MH42(1579.9,-258.59) MH43(1579.9,-291.09) MH44(1579.9,-323.59) MH45(1579.9,-856.09) MH46(1579.9,-758.59) MH47(1579.9,-791.09) MH48(1579.9,-823.59) MH49(1579.9,-1381.09) MH50(1579.9,-1283.59) MH51(1579.9,-1316.09) MH52(1579.9,-1348.59) MH53(1579.9,-1881.09) MH54(1579.9,-1783.59) MH55(1579.9,-1816.09) MH56(1579.9,-1848.59) MH57(1579.9,-2431.09) MH58(1579.9,-2333.59) MH59(1579.9,-2366.09) MH60(1579.9,-2398.59) MH61(1579.9,-2906.09) MH62(1579.9,-2808.59) MH63(1579.9,-2841.09) MH64(1579.9,-2873.59) MH69(-1580.1,-3831.09) MH70(-1580.1,-3928.59) MH71(-1580.1,-3896.09) MH72(-1580.1,-3863.59) MH73(-1580.1,-3331.09) MH74(-1580.1,-3428.59) MH75(-1580.1,-3396.09) MH76(-1580.1,-3363.59) MH77(1579.9,-3456.09) MH78(1579.9,-3358.59) MH79(1579.9,-3391.09) MH80(1579.9,-3423.59) MH81(1579.9,-3931.09) MH82(1579.9,-3833.59) MH83(1579.9,-3866.09) MH84(1579.9,-3898.59)
  round 86.61 hole 86.61 unplated: MH1(-393.9,-3237.39) MH1(-393.9,-2212.39) MH1(-393.9,-1187.39) MH1(-393.9,-162.39) MH1(-393.9,862.61) MH1(393.7,-4024.79) MH1(393.7,-2999.79) MH1(393.7,-1974.79) MH1(393.7,-949.79) MH1(393.7,75.21) MH2(-393.9,-4024.79) MH2(-393.9,-2999.79) MH2(-393.9,-1974.79) MH2(-393.9,-949.79) MH2(-393.9,75.21) MH2(393.7,-3237.39) MH2(393.7,-2212.39) MH2(393.7,-1187.39) MH2(393.7,-162.39) MH2(393.7,862.61) MH3(-1575,-3631.09) MH3(-1575,-2606.09) MH3(-1575,-1581.09) MH3(-1575,-556.09) MH3(-1575,468.91) MH3(1574.8,-3631.09) MH3(1574.8,-2606.09) MH3(1574.8,-1581.09) MH3(1574.8,-556.09) MH3(1574.8,468.91)
  round 50 hole 50 unplated: MH1(662.4,495.17)
  round 75 hole 75 unplated: MH65(-1812.6,-4006.09) MH66(1812.4,-4006.09) MH67(1812.4,843.91) MH68(-1812.6,843.91)

## Via types
v1: diameter 25/25 (per signal layer), hole 12, Top to Bottom, tented both sides, 43 vias

## Nets (pads, with @x,y where several pads share a name; then routed paths per layer and width w, separated by ;. In a path a pad name is that pad's centre, name@x,y a point inside that pad or via, vN(x,y) a via of type N, cw(c..) or ccw(c..) an arc to the next point about the centre after c; other vN are vias at no path point)
COM: J1.COM1 J1.COM2 J1.LS J1.RS R7.1 | length 1246.5
  Top w16: J1.COM2 802.4,810.17 J1.COM1 478.66,810.17 412.4,743.91 412.4,578.91 486.14,505.17 J1.RS 526.14,505.17 612.4,418.91 712.4,418.91 758.66,465.17 J1.LS 836.14,465.17 912.4,388.91 R7.1
GNDA: C5.2 C6.1 C7.2 C10.2 C11.1 J2.4 R13.2 R19.1 TP1.T U1.4 U2.2 U3.2 U4.3 | length 2601.9
  Top w16: R13.2@1032.4,238.91 R13.2 ; U1.4@1202.4,553.91 1209.01,560.52 U1.4 1279.01,560.52 v1(1287.4,568.91)
  Top w32: v1(187.4,588.91) 189.29,587.02 J2.4 304.29,587.02 C11.1 C10.2@657.4,303.91 ; C10.2 C10.2@657.4,303.91 ; R13.2 1042.4,238.91 1072.4,268.91 U2.2 1152.4,268.91 1162.4,278.91 1162.4,328.91 ; U3.2 1147.4,418.91 ; 1152.4,338.91 1162.4,328.91 ; 1157.4,408.91 1147.4,418.91 ; 1157.4,428.91 1147.4,418.91 ; v1@1279.01,560.52 1267.4,548.91 1197.4,548.91 1162.4,513.91 1162.4,408.91 ; C6.1 1257.4,343.91 1177.4,343.91 ; C5.2 v1(1467.4,736.41) C7.2 ; C10.2@657.4,303.91 772.4,303.91 U4.3 877.4,308.91 R19.1 932.4,343.91 1147.4,343.91 ; 1147.4,343.91 1162.4,343.91 ; 1147.4,343.91 1162.4,358.91 ; 1147.4,418.91 1152.4,418.91 1162.4,408.91 ; 1162.4,328.91 1162.4,343.91 ; 1162.4,328.91 1177.4,343.91 ; 1162.4,343.91 1162.4,348.91 ; 1162.4,343.91 1167.4,343.91 ; 1162.4,348.91 1167.4,343.91 ; 1162.4,348.91 1162.4,358.91 ; 1162.4,358.91 1177.4,343.91 ; 1162.4,358.91 1162.4,408.91 ; 1167.4,343.91 1177.4,343.91
  Bottom w32: TP1.T 62.4,713.91 v1(187.4,588.91) ; v1(1287.4,568.91) 1287.4,693.91 1329.9,736.41 v1(1467.4,736.41)
N$1: R4.1 R9.2 | length 65
  Top w12: R9.2 R4.1
N$2: C8.1 R8.1 U3.4 | length 141.9
  Top w12: U3.4 1220.99,388.91 R8.1 C8.1
N$3: J1.R R10.1 | length 461.2
  Top w16: J1.R 526.14,690.17 577.4,638.91 R10.1
N$4: J1.L R15.1 | length 141.9
  Top w16: J1.L 838.66,545.17 867.4,573.91 R15.1
N$7: R10.2 R11.2 R12.2 | length 130
  Top w16: R10.2 R11.2 R12.2
N$8: R5.2 R15.2 R16.2 | length 130
  Top w16: R15.2 R16.2 R5.2
N$9: C8.2 R2.2 U1.5 U3.1 | length 707.3
  Top w12: U3.1 1122.4,467.5 v1(1122.4,493.91) ; R2.2 1374.9,736.41 v1(1374.9,668.91) ; C8.2 1374.9,471.41 v1(1374.9,531.41) 1374.9,558.91 1376.51,560.52 U1.5
  Bottom w12: v1(1122.4,493.91) 1159.9,531.41 v1(1374.9,531.41) v1(1374.9,668.91)
N$10: R2.1 R3.2 U1.1 | length 180.5
  Top w16: U1.1 1265.79,637.3 1282.4,653.91 R3.2 R2.1
N$20: C2.2 R6.2 R14.1 | length 140
  Top w16: R6.2 R14.1 C2.2
N$22: R18.1 R19.2 U4.1 | length 251.9
  Top w12: U4.1 742.4,233.91 777.4,268.91 857.4,268.91 R19.2 R18.1
N$83: C2.1 R3.1 R8.2 U1.6 | length 421.7
  Top w16: R8.2 1342.4,508.91 1342.4,583.91 ; R3.1 1342.4,583.91 ; C2.1 1480.2,586.11 U1.6 1344.6,586.11 1342.4,583.91
N$92: C3.1 C4.1 R16.1 U1.3 | length 220.6
  Top w16: R16.1 C4.1 1137.4,573.91 C3.1 1159.6,586.11 U1.3
N$93: C1.2 C3.2 R11.1 U1.2 | length 222.7
  Top w16: R11.1 C1.2 1132.4,638.91 C3.2 1159.6,611.71 U1.2
N$102: R6.1 U2.3 | length 440.9
  Top w16: U2.3 1149.8,231.51 v1(1152.4,228.91) ; v1(1417.4,343.91) R6.1
  Bottom w16: v1(1152.4,228.91) 1372.4,228.91 1417.4,273.91 v1(1417.4,343.91)
N$105: C9.1 R1.1 R9.1 U2.4 | length 211
  Top w12: U2.4 1270,231.51 R1.1 C9.1 R9.1
V_REF: C1.1 C4.2 C10.1 C11.2 J2.SS1 J2.SS2 R4.2 R5.1 R7.2 R12.1 R14.2 R17.1 R18.2 TP4.T U3.3 U4.2
  other v1: 1537.4,143.91 362.4,193.91 487.4,193.91 537.4,193.91 637.4,193.91 787.4,193.91 837.4,193.91 1537.4,193.91 462.4,243.91 462.4,293.91 1462.4,293.91 1462.4,343.91 562.4,393.91 762.4,393.91 837.4,393.91 1062.4,393.91 1062.4,443.91 897.4,493.91 1212.4,493.91 897.4,543.91 637.4,593.91 712.4,593.91 637.4,718.91 712.4,718.91 1062.4,743.91 1112.4,743.91 912.4,768.91
VCC: C5.1 C6.2 C7.1 J2.3 R17.2 TP2.T U1.7 U1.8 U2.5 U3.5 | length 2430.3
  Top w12: U3.5@1204.8,456.31 U3.5 ; U2.5@1205,311.31 1205,306.31 U2.5 1225,306.31 1247.4,283.91 1307.4,283.91 C6.2
  Top w16: v1(187.4,508.91) 188.03,508.28 J2.3 303.03,508.28 v1(467.4,343.91) R17.2 ; v1(1212.4,428.91) 1213.59,430.09 U3.5 ; C6.2 1342.4,323.91 v1(1362.4,343.91) ; U1.7 1445.2,611.71 1452.4,618.91 1452.4,628.91 1444.01,637.3 U1.8 1407.4,643.71 v1(1407.4,663.91) C5.1 ; C5.1@1400.98,697.49 C5.1 ; C7.1 C5.1
  Bottom w16: TP2.T 172.4,508.91 v1(187.4,508.91) ; v1(467.4,343.91) 1202.4,343.91 ; v1(1212.4,428.91) 1212.4,353.91 ; v1(1407.4,663.91) 1407.4,388.91 v1(1362.4,343.91) 1222.4,343.91 ; 1202.4,343.91 1212.4,353.91 ; 1202.4,343.91 1207.4,343.91 ; 1207.4,343.91 1212.4,348.91 1212.4,353.91 ; 1207.4,343.91 1222.4,343.91 ; 1212.4,353.91 1222.4,343.91
VOUT: C9.2 J2.1 R1.2 R13.1 TP3.T U2.1 | length 1631.5
  Top w12: v1(187.4,351.41) 188.01,350.8 J2.1 290.51,350.8 477.89,163.42 1041.91,163.42 v1(1072.4,193.91) 1282.4,193.91 R1.2 C9.2 ; R13.1 1044.8,306.31 v1(1071.41,306.31) U2.1
  Bottom w12: v1(1071.41,306.31) 1072.4,305.32 v1(1072.4,193.91)
  Bottom w16: TP3.T 187.4,343.91 v1(187.4,351.41)
pads on no net: J2.2 P1.P$1 P2.P$1 P3.P$1 P4.P$1

## Polygon pours and split planes (outlines as drawn)
V_REF on Bottom "Polygon_1_Net_V_REF" (solid, remove dead copper, pour order 1): -16.6,947.91 1666.4,947.91 1666.4,18.91 1666.4,-10.09 -16.6,-10.09
V_REF on Top "Polygon_2_Net_V_REF" (solid, remove dead copper, pour order 0): -16.6,947.91 1666.4,947.91 1666.4,18.91 1666.4,-10.09 -16.6,-10.09

## Keep-outs
Keep-Out Layer:
  the board outline again, w1

## Silkscreen, mask and mechanical layers (free items; w line width, h text height)
Top Overlay:
  text "GNDA" at 322.4,553.91 h29.75
  text "VCC" at 322.4,478.91 h29.75
  text "NC" at 322.4,398.91 h29.75
  text "VOUT" at 317.4,318.91 h29.75
Bottom Overlay:
  text "EMG Sensor v1.0" at 1012.4,343.91 h42.5
Dimension:
  drawing of 321 lines, arcs and shapes, not listed
dxf:
  lines w0: -1575.1,-3931.09 -1737.6,-3931.09 -1737.6,-4106.09 -1887.6,-4106.09 -1887.6,943.91 -1737.6,943.91 -1737.6,768.91 -1575.1,768.91 ; -1575.1,-3831.09 -1737.6,-3831.09 -1737.6,-3431.09 -1575.1,-3431.09 ; -1575.1,-3331.09 -1737.6,-3331.09 -1737.6,-2906.09 -1575.1,-2906.09 ; -1575.1,-2806.09 -1737.6,-2806.09 -1737.6,-2406.09 -1575.1,-2406.09 ; -1575.1,-2306.09 -1737.6,-2306.09 -1737.6,-1881.09 -1575.1,-1881.09 ; -1575.1,-1781.09 -1737.6,-1781.09 -1737.6,-1381.09 -1575.1,-1381.09 ; -1575.1,-1281.09 -1737.6,-1281.09 -1737.6,-856.09 -1575.1,-856.09 ; -1575.1,-756.09 -1737.6,-756.09 -1737.6,-356.09 -1575.1,-356.09 ; -1575.1,-256.09 -1737.6,-256.09 -1737.6,193.91 -1575.1,193.91 ; -1575.1,293.91 -1737.6,293.91 -1737.6,668.91 -1575.1,668.91 ; 1574.9,-3931.09 1737.4,-3931.09 1737.4,-4106.09 1887.4,-4106.09 1887.4,943.91 1737.4,943.91 1737.4,768.91 1574.9,768.91 ; 1574.9,-3831.09 1737.4,-3831.09 1737.4,-3456.09 1574.9,-3456.09 ; 1574.9,-3356.09 1737.4,-3356.09 1737.4,-2906.09 1574.9,-2906.09 ; 1574.9,-2806.09 1737.4,-2806.09 1737.4,-2431.09 1574.9,-2431.09 ; 1574.9,-2331.09 1737.4,-2331.09 1737.4,-1881.09 1574.9,-1881.09 ; 1574.9,-1781.09 1737.4,-1781.09 1737.4,-1381.09 1574.9,-1381.09 ; 1574.9,-1281.09 1737.4,-1281.09 1737.4,-856.09 1574.9,-856.09 ; 1574.9,-756.09 1737.4,-756.09 1737.4,-356.09 1574.9,-356.09 ; 1574.9,-256.09 1737.4,-256.09 1737.4,168.91 1574.9,168.91 ; 1574.9,268.91 1737.4,268.91 1737.4,668.91 1574.9,668.91

## Dimensions
-1887.6,943.91 to -1887.6,-4106.09 on tFinish
-1887.6,943.91 to 1887.4,943.91 on tFinish

## Text inside footprints (layer, text, board x,y; h text height)
U$2: Reference "READ VOL/GET VOLSIG" at 1637.4,593.91 h29.75; Reference "First Choice" at 112.4,343.91 h42.5; Reference "First Choice" at 62.4,-606.09 h42.5; Reference "4P-SMD-2.0" at 1387.4,-431.09 h29.75 r90; Reference "4P-2.0" at 1612.4,-356.09 h29.75 r90; Reference "4P-SMD-2.0-90D" at 1062.4,-481.09 h29.75 r90; Reference "4P-SMD-2.0-90D" at 587.4,-481.09 h29.75 r90; Reference "4P-2.0" at 12.4,-356.09 h29.75 r90; Reference "4P-SMD-2.0" at 237.4,-406.09 h29.75 r90; Reference "READ VOL/4" at 1637.4,693.91 h29.75; Reference "READ VOL" at 1637.4,293.91 h29.75; Reference "GND" at 1637.4,218.91 h29.75; Reference "SIG/READ VOL" at -437.6,218.91 h29.75; Reference "SIG" at -137.6,293.91 h29.75; Reference "VCC" at -137.6,593.91 h29.75; Reference "GND" at -137.6,693.91 h29.75; Reference "4P-SMD-2.0" at 1337.4,568.91 h29.75 r90; Reference "4P-2.0" at 1462.4,568.91 h29.75 r90; Reference "4P-SMD-2.0-90D" at 1212.4,568.91 h29.75 r90; Reference "4P-SMD-2.0-90D" at 412.4,568.91 h29.75 r90; Reference "4P-2.0" at 162.4,568.91 h29.75 r90; Reference "4P-SMD-2.0" at 287.4,568.91 h29.75 r90; Reference "TP" at 1662.4,443.91 h29.75 r90; Reference "TP" at -62.6,443.91 h29.75 r90
U$5: Reference "READ VOL/GET VOLSIG" at -1637.6,343.91 h29.75 r180; Reference "First Choice" at -112.6,593.91 h42.5 r180; Reference "First Choice" at -62.6,1543.91 h42.5 r180; Reference "4P-SMD-2.0" at -1387.6,1368.91 h29.75 r270; Reference "4P-2.0" at -1612.6,1293.91 h29.75 r270; Reference "4P-SMD-2.0-90D" at -1062.6,1418.91 h29.75 r270; Reference "4P-SMD-2.0-90D" at -587.6,1418.91 h29.75 r270; Reference "4P-2.0" at -12.6,1293.91 h29.75 r270; Reference "4P-SMD-2.0" at -237.6,1343.91 h29.75 r270; Reference "READ VOL/4" at -1637.6,243.91 h29.75 r180; Reference "READ VOL" at -1637.6,643.91 h29.75 r180; Reference "GND" at -1637.6,718.91 h29.75 r180; Reference "SIG/READ VOL" at 437.4,718.91 h29.75 r180; Reference "SIG" at 137.4,643.91 h29.75 r180; Reference "VCC" at 137.4,343.91 h29.75 r180; Reference "GND" at 137.4,243.91 h29.75 r180; Reference "4P-SMD-2.0" at -1337.6,368.91 h29.75 r270; Reference "4P-2.0" at -1462.6,368.91 h29.75 r270; Reference "4P-SMD-2.0-90D" at -1212.6,368.91 h29.75 r270; Reference "4P-SMD-2.0-90D" at -412.6,368.91 h29.75 r270; Reference "4P-2.0" at -162.6,368.91 h29.75 r270; Reference "4P-SMD-2.0" at -287.6,368.91 h29.75 r270; Reference "TP" at -1662.6,493.91 h29.75 r270; Reference "TP" at 62.4,493.91 h29.75 r270
U$6: Reference "READ VOL/GET VOLSIG" at -1637.6,-681.09 h29.75 r180; Reference "First Choice" at -112.6,-431.09 h42.5 r180; Reference "First Choice" at -62.6,518.91 h42.5 r180; Reference "4P-SMD-2.0" at -1387.6,343.91 h29.75 r270; Reference "4P-2.0" at -1612.6,268.91 h29.75 r270; Reference "4P-SMD-2.0-90D" at -1062.6,393.91 h29.75 r270; Reference "4P-SMD-2.0-90D" at -587.6,393.91 h29.75 r270; Reference "4P-2.0" at -12.6,268.91 h29.75 r270; Reference "4P-SMD-2.0" at -237.6,318.91 h29.75 r270; Reference "READ VOL/4" at -1637.6,-781.09 h29.75 r180; Reference "READ VOL" at -1637.6,-381.09 h29.75 r180; Reference "GND" at -1637.6,-306.09 h29.75 r180; Reference "SIG/READ VOL" at 437.4,-306.09 h29.75 r180; Reference "SIG" at 137.4,-381.09 h29.75 r180; Reference "VCC" at 137.4,-681.09 h29.75 r180; Reference "GND" at 137.4,-781.09 h29.75 r180; Reference "4P-SMD-2.0" at -1337.6,-656.09 h29.75 r270; Reference "4P-2.0" at -1462.6,-656.09 h29.75 r270; Reference "4P-SMD-2.0-90D" at -1212.6,-656.09 h29.75 r270; Reference "4P-SMD-2.0-90D" at -412.6,-656.09 h29.75 r270; Reference "4P-2.0" at -162.6,-656.09 h29.75 r270; Reference "4P-SMD-2.0" at -287.6,-656.09 h29.75 r270; Reference "TP" at -1662.6,-531.09 h29.75 r270; Reference "TP" at 62.4,-531.09 h29.75 r270
U$7: Reference "READ VOL/GET VOLSIG" at 1637.4,-431.09 h29.75; Reference "First Choice" at 112.4,-681.09 h42.5; Reference "First Choice" at 62.4,-1631.09 h42.5; Reference "4P-SMD-2.0" at 1387.4,-1456.09 h29.75 r90; Reference "4P-2.0" at 1612.4,-1381.09 h29.75 r90; Reference "4P-SMD-2.0-90D" at 1062.4,-1506.09 h29.75 r90; Reference "4P-SMD-2.0-90D" at 587.4,-1506.09 h29.75 r90; Reference "4P-2.0" at 12.4,-1381.09 h29.75 r90; Reference "4P-SMD-2.0" at 237.4,-1431.09 h29.75 r90; Reference "READ VOL/4" at 1637.4,-331.09 h29.75; Reference "READ VOL" at 1637.4,-731.09 h29.75; Reference "GND" at 1637.4,-806.09 h29.75; Reference "SIG/READ VOL" at -437.6,-806.09 h29.75; Reference "SIG" at -137.6,-731.09 h29.75; Reference "VCC" at -137.6,-431.09 h29.75; Reference "GND" at -137.6,-331.09 h29.75; Reference "4P-SMD-2.0" at 1337.4,-456.09 h29.75 r90; Reference "4P-2.0" at 1462.4,-456.09 h29.75 r90; Reference "4P-SMD-2.0-90D" at 1212.4,-456.09 h29.75 r90; Reference "4P-SMD-2.0-90D" at 412.4,-456.09 h29.75 r90; Reference "4P-2.0" at 162.4,-456.09 h29.75 r90; Reference "4P-SMD-2.0" at 287.4,-456.09 h29.75 r90; Reference "TP" at 1662.4,-581.09 h29.75 r90; Reference "TP" at -62.6,-581.09 h29.75 r90
U$8: Reference "READ VOL/GET VOLSIG" at -1637.6,-1706.09 h29.75 r180; Reference "First Choice" at -112.6,-1456.09 h42.5 r180; Reference "First Choice" at -62.6,-506.09 h42.5 r180; Reference "4P-SMD-2.0" at -1387.6,-681.09 h29.75 r270; Reference "4P-2.0" at -1612.6,-756.09 h29.75 r270; Reference "4P-SMD-2.0-90D" at -1062.6,-631.09 h29.75 r270; Reference "4P-SMD-2.0-90D" at -587.6,-631.09 h29.75 r270; Reference "4P-2.0" at -12.6,-756.09 h29.75 r270; Reference "4P-SMD-2.0" at -237.6,-706.09 h29.75 r270; Reference "READ VOL/4" at -1637.6,-1806.09 h29.75 r180; Reference "READ VOL" at -1637.6,-1406.09 h29.75 r180; Reference "GND" at -1637.6,-1331.09 h29.75 r180; Reference "SIG/READ VOL" at 437.4,-1331.09 h29.75 r180; Reference "SIG" at 137.4,-1406.09 h29.75 r180; Reference "VCC" at 137.4,-1706.09 h29.75 r180; Reference "GND" at 137.4,-1806.09 h29.75 r180; Reference "4P-SMD-2.0" at -1337.6,-1681.09 h29.75 r270; Reference "4P-2.0" at -1462.6,-1681.09 h29.75 r270; Reference "4P-SMD-2.0-90D" at -1212.6,-1681.09 h29.75 r270; Reference "4P-SMD-2.0-90D" at -412.6,-1681.09 h29.75 r270; Reference "4P-2.0" at -162.6,-1681.09 h29.75 r270; Reference "4P-SMD-2.0" at -287.6,-1681.09 h29.75 r270; Reference "TP" at -1662.6,-1556.09 h29.75 r270; Reference "TP" at 62.4,-1556.09 h29.75 r270
U$9: Reference "READ VOL/GET VOLSIG" at 1637.4,-1456.09 h29.75; Reference "First Choice" at 112.4,-1706.09 h42.5; Reference "First Choice" at 62.4,-2656.09 h42.5; Reference "4P-SMD-2.0" at 1387.4,-2481.09 h29.75 r90; Reference "4P-2.0" at 1612.4,-2406.09 h29.75 r90; Reference "4P-SMD-2.0-90D" at 1062.4,-2531.09 h29.75 r90; Reference "4P-SMD-2.0-90D" at 587.4,-2531.09 h29.75 r90; Reference "4P-2.0" at 12.4,-2406.09 h29.75 r90; Reference "4P-SMD-2.0" at 237.4,-2456.09 h29.75 r90; Reference "READ VOL/4" at 1637.4,-1356.09 h29.75; Reference "READ VOL" at 1637.4,-1756.09 h29.75; Reference "GND" at 1637.4,-1831.09 h29.75; Reference "SIG/READ VOL" at -437.6,-1831.09 h29.75; Reference "SIG" at -137.6,-1756.09 h29.75; Reference "VCC" at -137.6,-1456.09 h29.75; Reference "GND" at -137.6,-1356.09 h29.75; Reference "4P-SMD-2.0" at 1337.4,-1481.09 h29.75 r90; Reference "4P-2.0" at 1462.4,-1481.09 h29.75 r90; Reference "4P-SMD-2.0-90D" at 1212.4,-1481.09 h29.75 r90; Reference "4P-SMD-2.0-90D" at 412.4,-1481.09 h29.75 r90; Reference "4P-2.0" at 162.4,-1481.09 h29.75 r90; Reference "4P-SMD-2.0" at 287.4,-1481.09 h29.75 r90; Reference "TP" at 1662.4,-1606.09 h29.75 r90; Reference "TP" at -62.6,-1606.09 h29.75 r90
U$10: Reference "READ VOL/GET VOLSIG" at -1637.6,-2731.09 h29.75 r180; Reference "First Choice" at -112.6,-2481.09 h42.5 r180; Reference "First Choice" at -62.6,-1531.09 h42.5 r180; Reference "4P-SMD-2.0" at -1387.6,-1706.09 h29.75 r270; Reference "4P-2.0" at -1612.6,-1781.09 h29.75 r270; Reference "4P-SMD-2.0-90D" at -1062.6,-1656.09 h29.75 r270; Reference "4P-SMD-2.0-90D" at -587.6,-1656.09 h29.75 r270; Reference "4P-2.0" at -12.6,-1781.09 h29.75 r270; Reference "4P-SMD-2.0" at -237.6,-1731.09 h29.75 r270; Reference "READ VOL/4" at -1637.6,-2831.09 h29.75 r180; Reference "READ VOL" at -1637.6,-2431.09 h29.75 r180; Reference "GND" at -1637.6,-2356.09 h29.75 r180; Reference "SIG/READ VOL" at 437.4,-2356.09 h29.75 r180; Reference "SIG" at 137.4,-2431.09 h29.75 r180; Reference "VCC" at 137.4,-2731.09 h29.75 r180; Reference "GND" at 137.4,-2831.09 h29.75 r180; Reference "4P-SMD-2.0" at -1337.6,-2706.09 h29.75 r270; Reference "4P-2.0" at -1462.6,-2706.09 h29.75 r270; Reference "4P-SMD-2.0-90D" at -1212.6,-2706.09 h29.75 r270; Reference "4P-SMD-2.0-90D" at -412.6,-2706.09 h29.75 r270; Reference "4P-2.0" at -162.6,-2706.09 h29.75 r270; Reference "4P-SMD-2.0" at -287.6,-2706.09 h29.75 r270; Reference "TP" at -1662.6,-2581.09 h29.75 r270; Reference "TP" at 62.4,-2581.09 h29.75 r270
U$11: Reference "READ VOL/GET VOLSIG" at 1637.4,-2481.09 h29.75; Reference "First Choice" at 112.4,-2731.09 h42.5; Reference "First Choice" at 62.4,-3681.09 h42.5; Reference "4P-SMD-2.0" at 1387.4,-3506.09 h29.75 r90; Reference "4P-2.0" at 1612.4,-3431.09 h29.75 r90; Reference "4P-SMD-2.0-90D" at 1062.4,-3556.09 h29.75 r90; Reference "4P-SMD-2.0-90D" at 587.4,-3556.09 h29.75 r90; Reference "4P-2.0" at 12.4,-3431.09 h29.75 r90; Reference "4P-SMD-2.0" at 237.4,-3481.09 h29.75 r90; Reference "READ VOL/4" at 1637.4,-2381.09 h29.75; Reference "READ VOL" at 1637.4,-2781.09 h29.75; Reference "GND" at 1637.4,-2856.09 h29.75; Reference "SIG/READ VOL" at -437.6,-2856.09 h29.75; Reference "SIG" at -137.6,-2781.09 h29.75; Reference "VCC" at -137.6,-2481.09 h29.75; Reference "GND" at -137.6,-2381.09 h29.75; Reference "4P-SMD-2.0" at 1337.4,-2506.09 h29.75 r90; Reference "4P-2.0" at 1462.4,-2506.09 h29.75 r90; Reference "4P-SMD-2.0-90D" at 1212.4,-2506.09 h29.75 r90; Reference "4P-SMD-2.0-90D" at 412.4,-2506.09 h29.75 r90; Reference "4P-2.0" at 162.4,-2506.09 h29.75 r90; Reference "4P-SMD-2.0" at 287.4,-2506.09 h29.75 r90; Reference "TP" at 1662.4,-2631.09 h29.75 r90; Reference "TP" at -62.6,-2631.09 h29.75 r90
U$12: Reference "READ VOL/GET VOLSIG" at -1637.6,-3756.09 h29.75 r180; Reference "First Choice" at -112.6,-3506.09 h42.5 r180; Reference "First Choice" at -62.6,-2556.09 h42.5 r180; Reference "4P-SMD-2.0" at -1387.6,-2731.09 h29.75 r270; Reference "4P-2.0" at -1612.6,-2806.09 h29.75 r270; Reference "4P-SMD-2.0-90D" at -1062.6,-2681.09 h29.75 r270; Reference "4P-SMD-2.0-90D" at -587.6,-2681.09 h29.75 r270; Reference "4P-2.0" at -12.6,-2806.09 h29.75 r270; Reference "4P-SMD-2.0" at -237.6,-2756.09 h29.75 r270; Reference "READ VOL/4" at -1637.6,-3856.09 h29.75 r180; Reference "READ VOL" at -1637.6,-3456.09 h29.75 r180; Reference "GND" at -1637.6,-3381.09 h29.75 r180; Reference "SIG/READ VOL" at 437.4,-3381.09 h29.75 r180; Reference "SIG" at 137.4,-3456.09 h29.75 r180; Reference "VCC" at 137.4,-3756.09 h29.75 r180; Reference "GND" at 137.4,-3856.09 h29.75 r180; Reference "4P-SMD-2.0" at -1337.6,-3731.09 h29.75 r270; Reference "4P-2.0" at -1462.6,-3731.09 h29.75 r270; Reference "4P-SMD-2.0-90D" at -1212.6,-3731.09 h29.75 r270; Reference "4P-SMD-2.0-90D" at -412.6,-3731.09 h29.75 r270; Reference "4P-2.0" at -162.6,-3731.09 h29.75 r270; Reference "4P-SMD-2.0" at -287.6,-3731.09 h29.75 r270; Reference "TP" at -1662.6,-3606.09 h29.75 r270; Reference "TP" at 62.4,-3606.09 h29.75 r270
U$13: Reference "READ VOL/GET VOLSIG" at 1637.4,-3506.09 h29.75; Reference "First Choice" at 112.4,-3756.09 h42.5; Reference "First Choice" at 62.4,-4706.09 h42.5; Reference "4P-SMD-2.0" at 1387.4,-4531.09 h29.75 r90; Reference "4P-2.0" at 1612.4,-4456.09 h29.75 r90; Reference "4P-SMD-2.0-90D" at 1062.4,-4581.09 h29.75 r90; Reference "4P-SMD-2.0-90D" at 587.4,-4581.09 h29.75 r90; Reference "4P-2.0" at 12.4,-4456.09 h29.75 r90; Reference "4P-SMD-2.0" at 237.4,-4506.09 h29.75 r90; Reference "READ VOL/4" at 1637.4,-3406.09 h29.75; Reference "READ VOL" at 1637.4,-3806.09 h29.75; Reference "GND" at 1637.4,-3881.09 h29.75; Reference "SIG/READ VOL" at -437.6,-3881.09 h29.75; Reference "SIG" at -137.6,-3806.09 h29.75; Reference "VCC" at -137.6,-3506.09 h29.75; Reference "GND" at -137.6,-3406.09 h29.75; Reference "4P-SMD-2.0" at 1337.4,-3531.09 h29.75 r90; Reference "4P-2.0" at 1462.4,-3531.09 h29.75 r90; Reference "4P-SMD-2.0-90D" at 1212.4,-3531.09 h29.75 r90; Reference "4P-SMD-2.0-90D" at 412.4,-3531.09 h29.75 r90; Reference "4P-2.0" at 162.4,-3531.09 h29.75 r90; Reference "4P-SMD-2.0" at 287.4,-3531.09 h29.75 r90; Reference "TP" at 1662.4,-3656.09 h29.75 r90; Reference "TP" at -62.6,-3656.09 h29.75 r90